# EAGLE board ARTIC_R2_Module-Panel (EAGLE 9.6.2), part 1 of 11
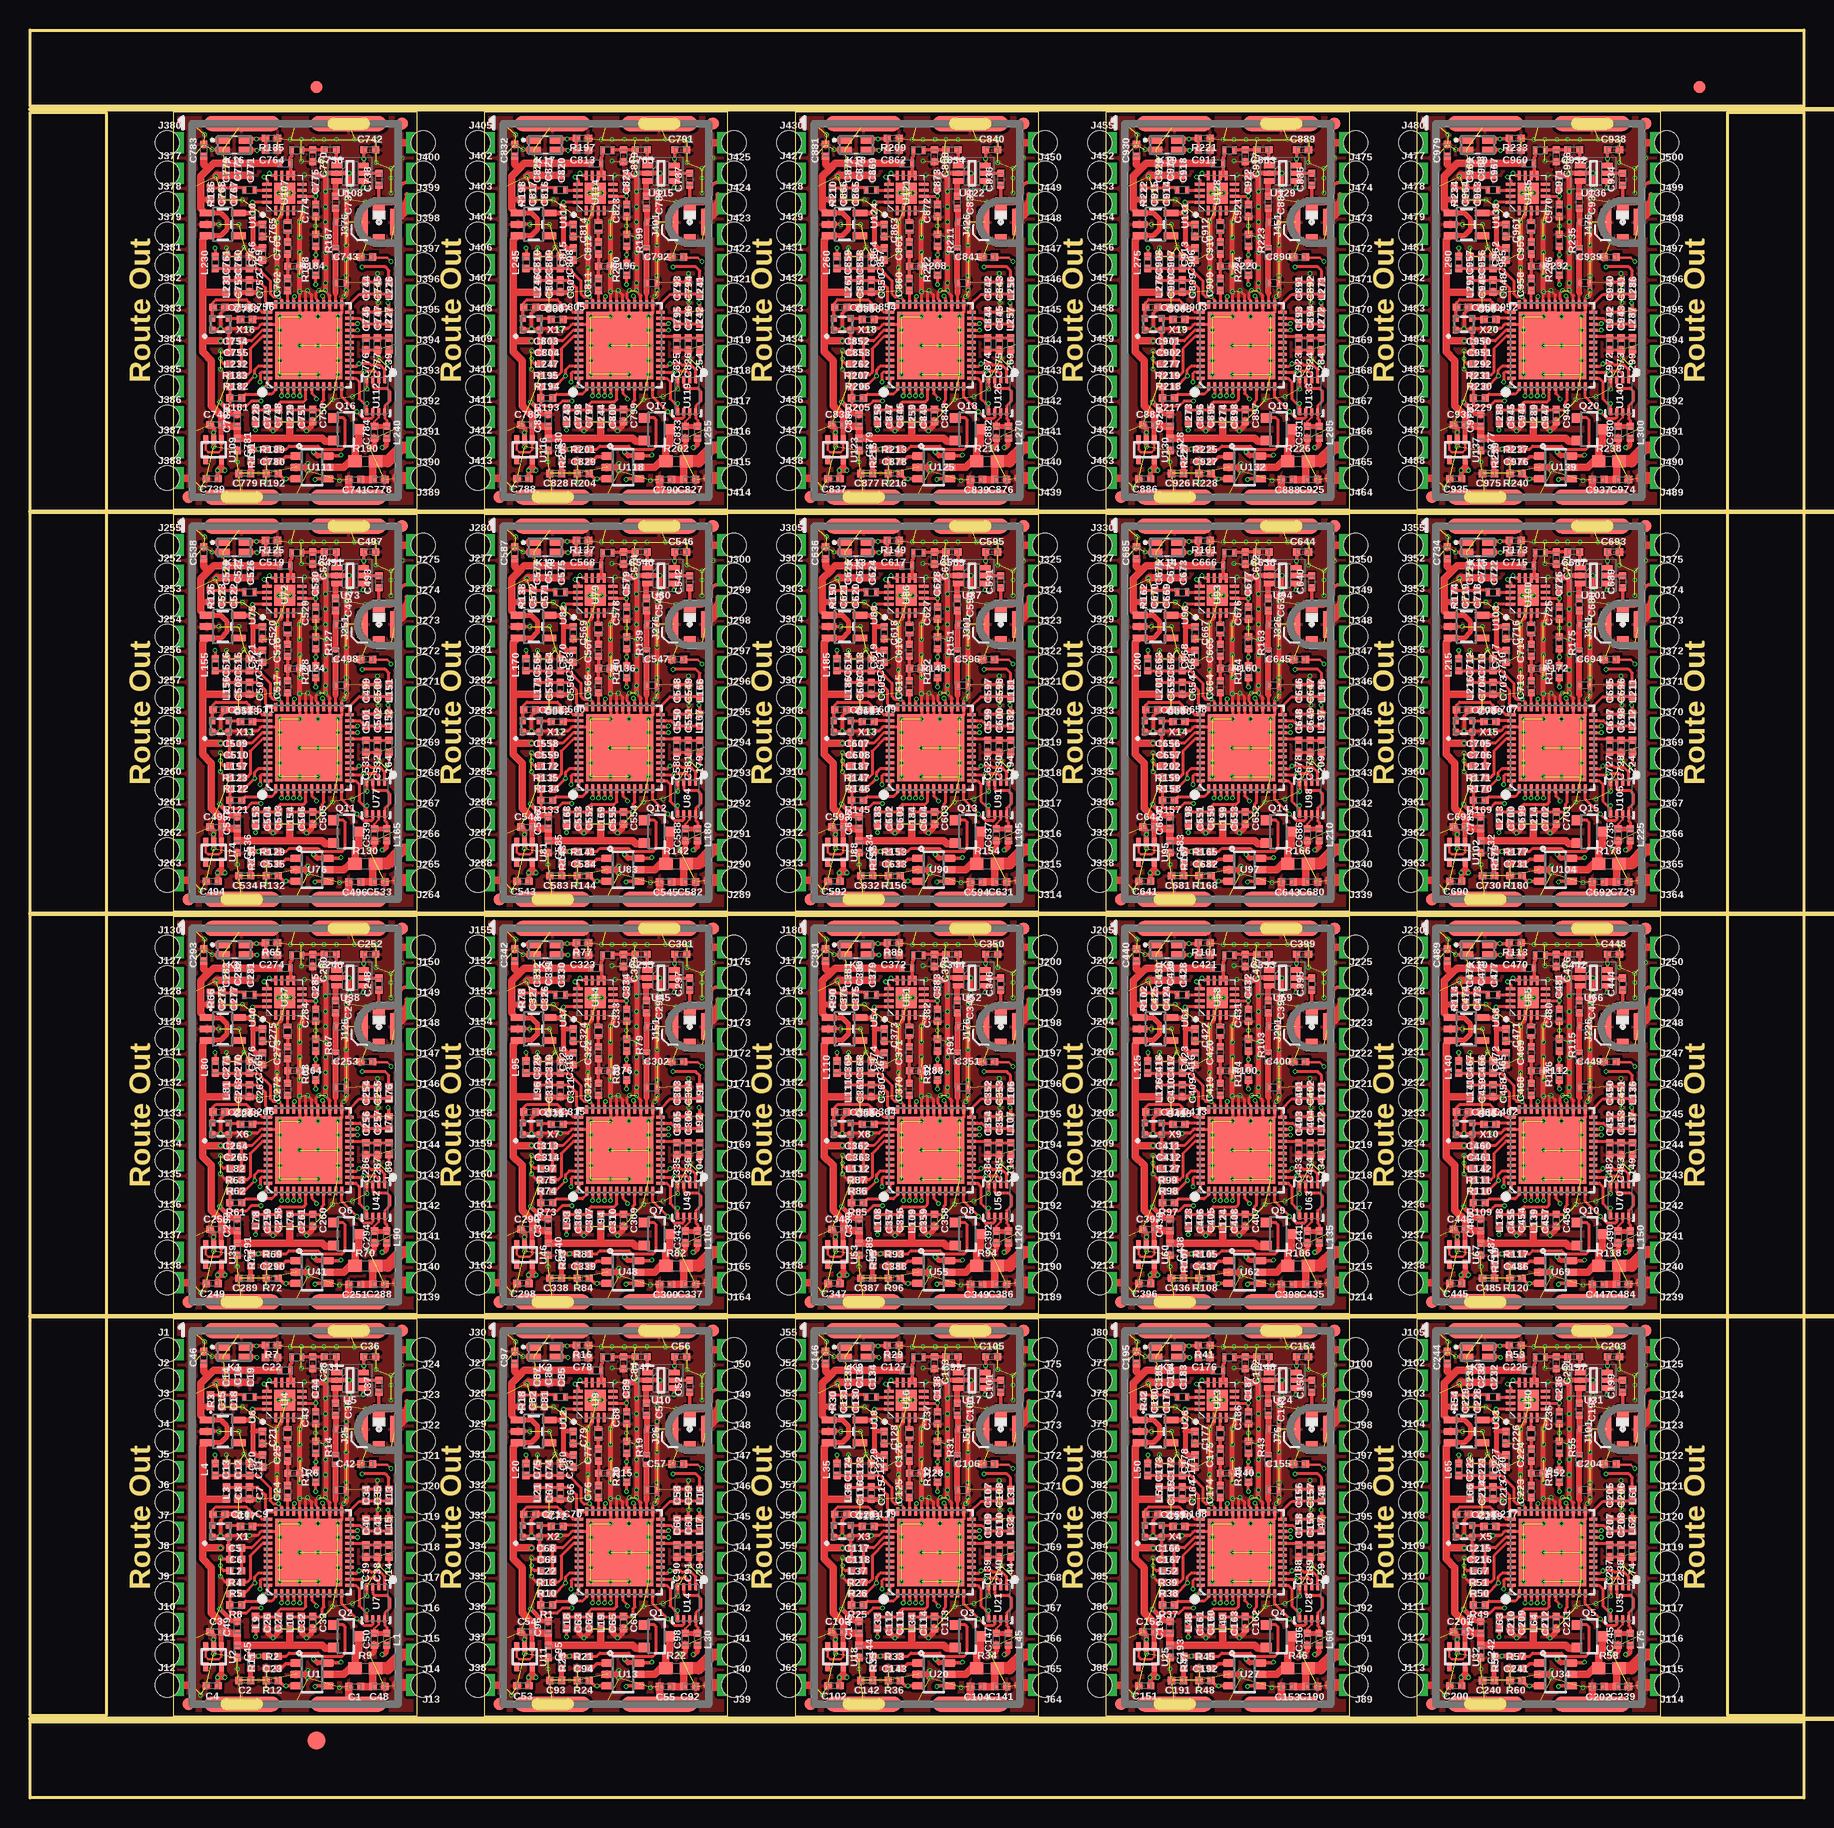
[diagram p0: board, top side]
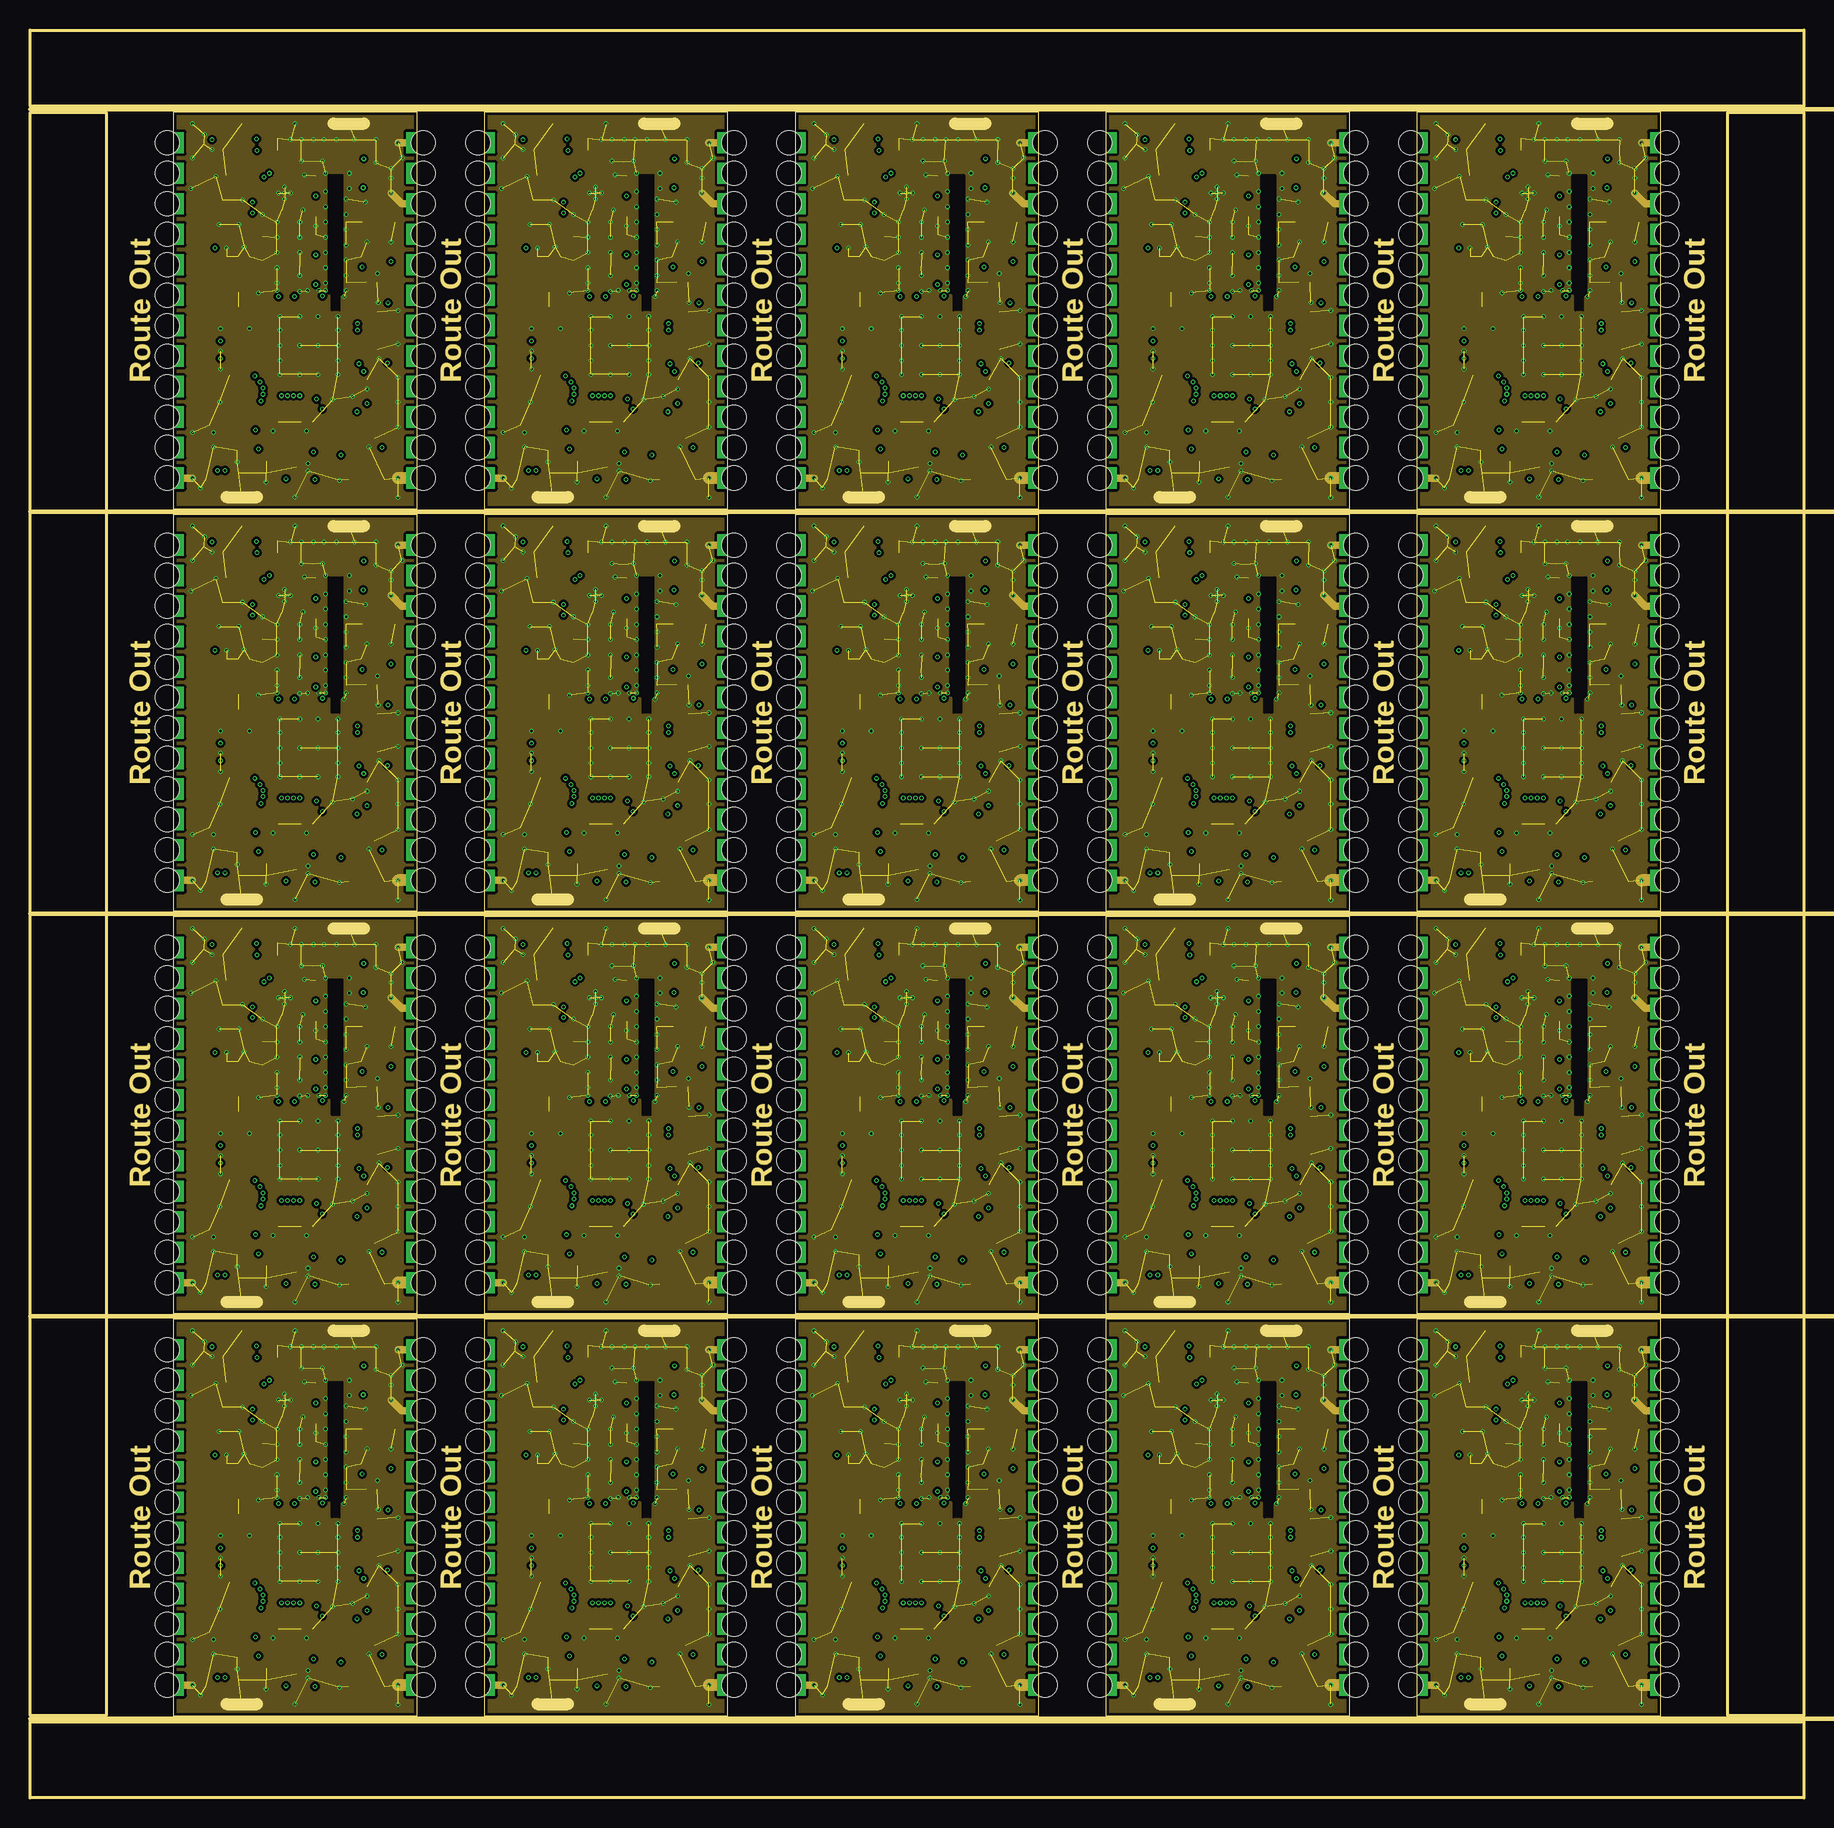
[diagram p1: board, inner layer Route2]
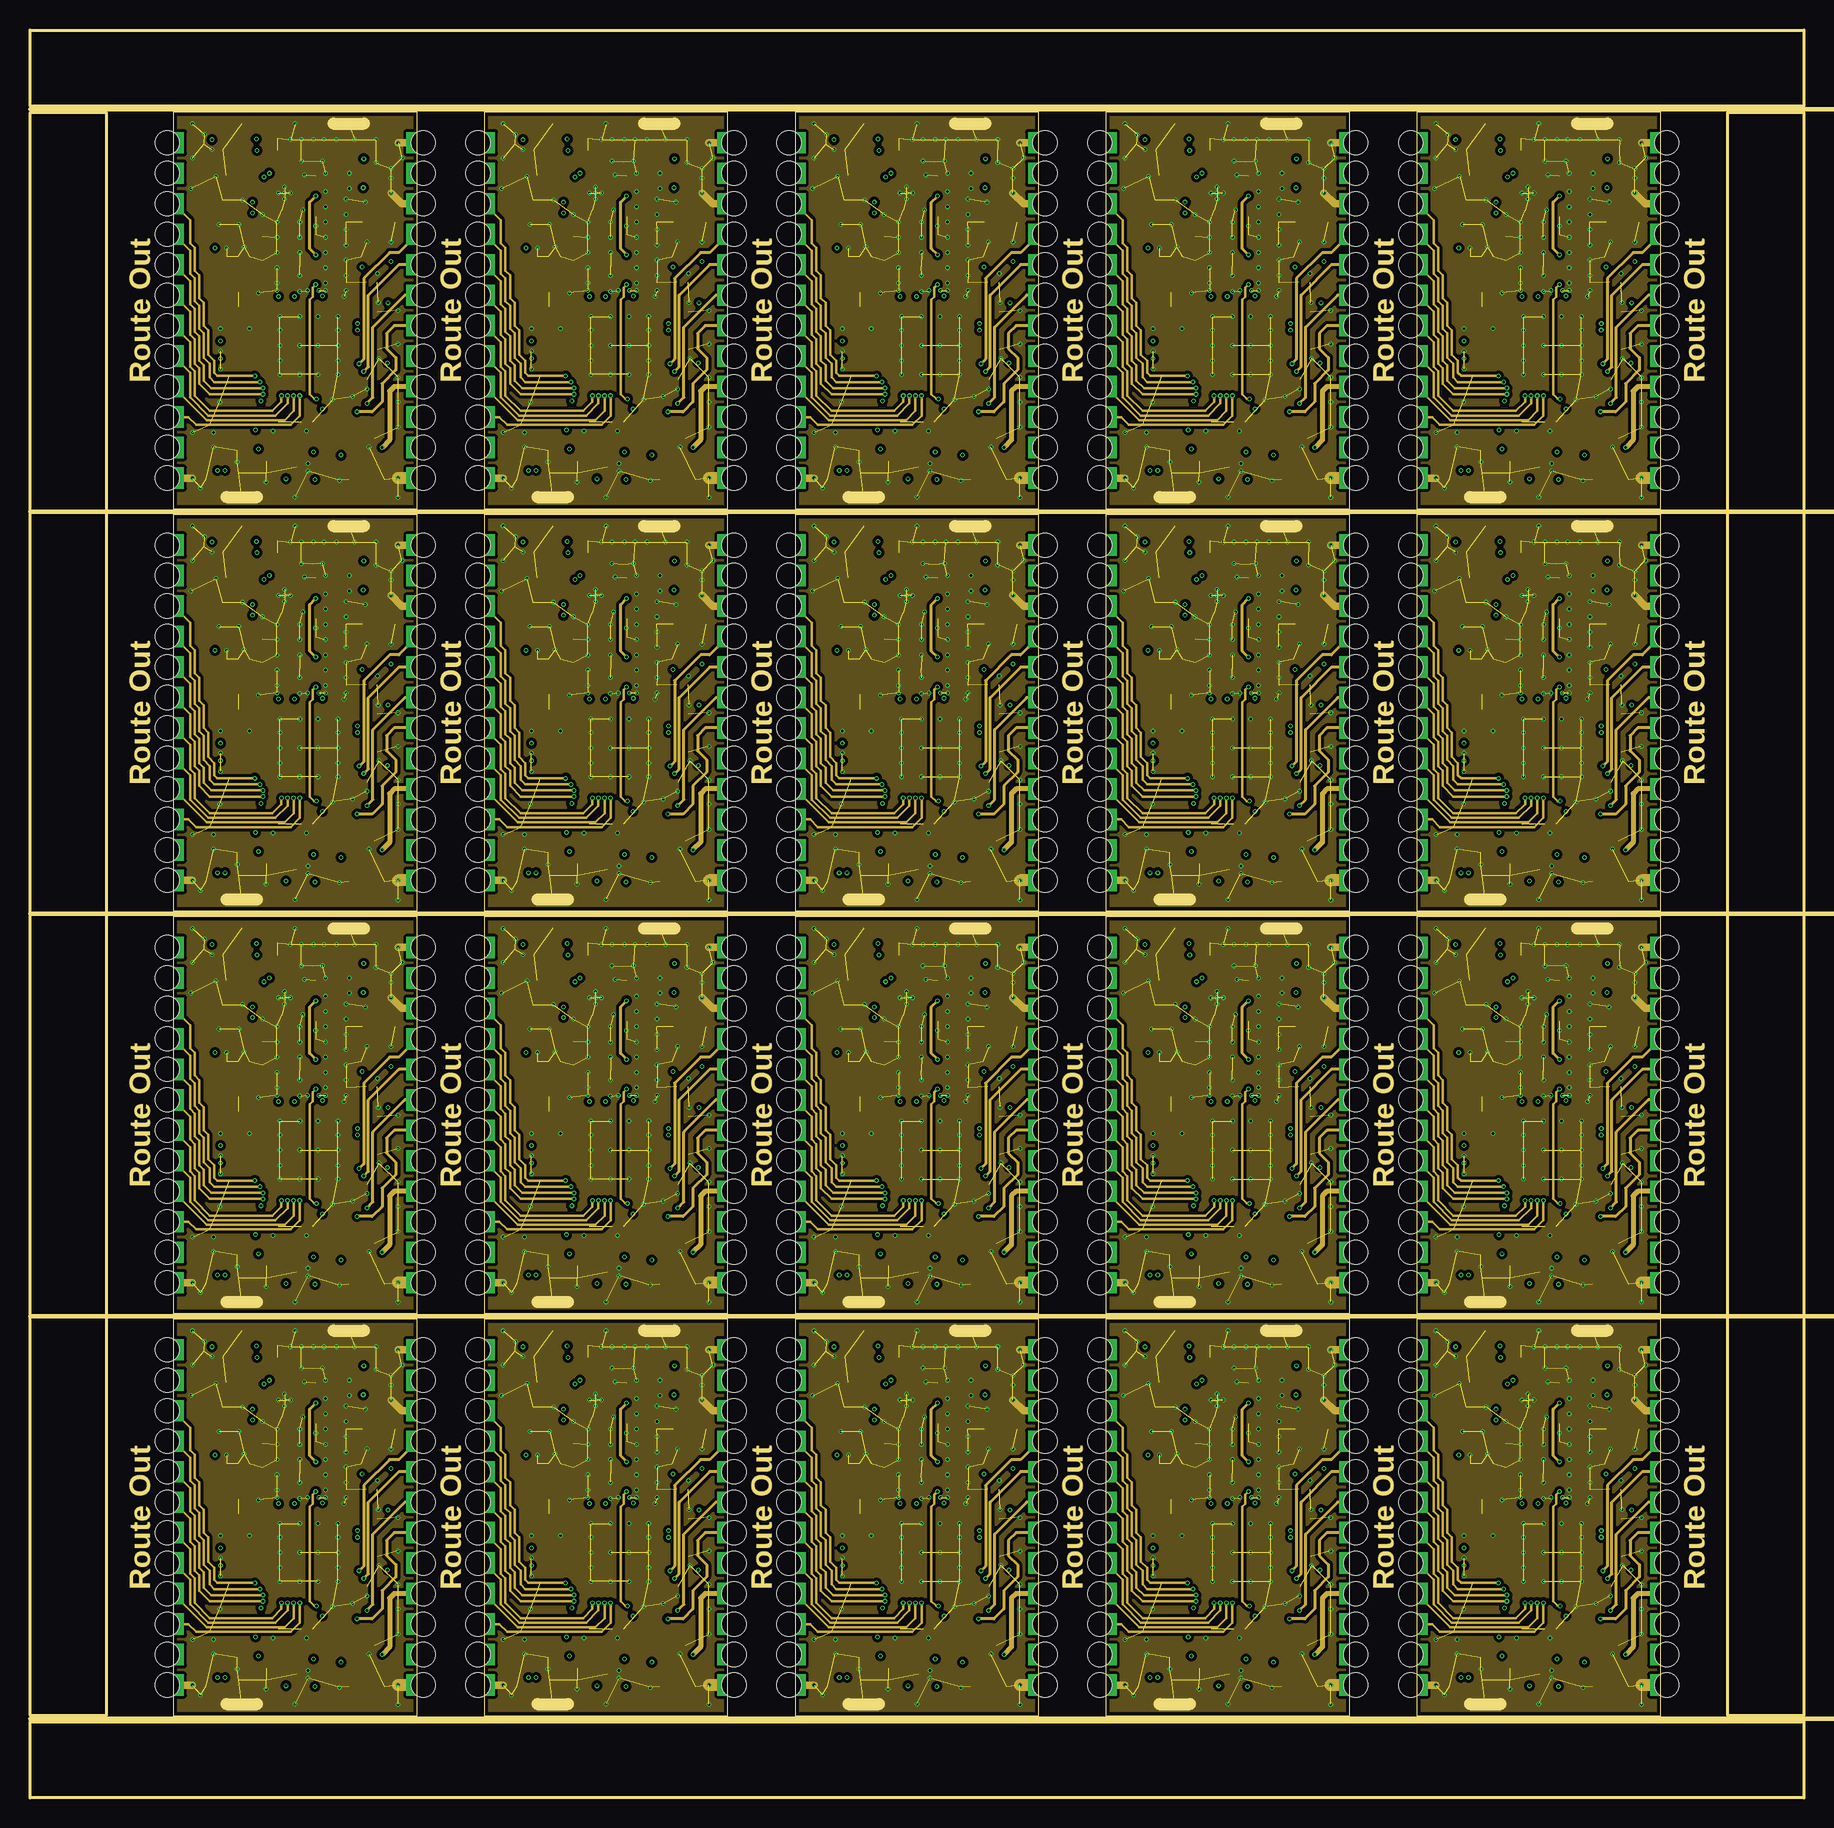
[diagram p2: board, inner layer Route15]
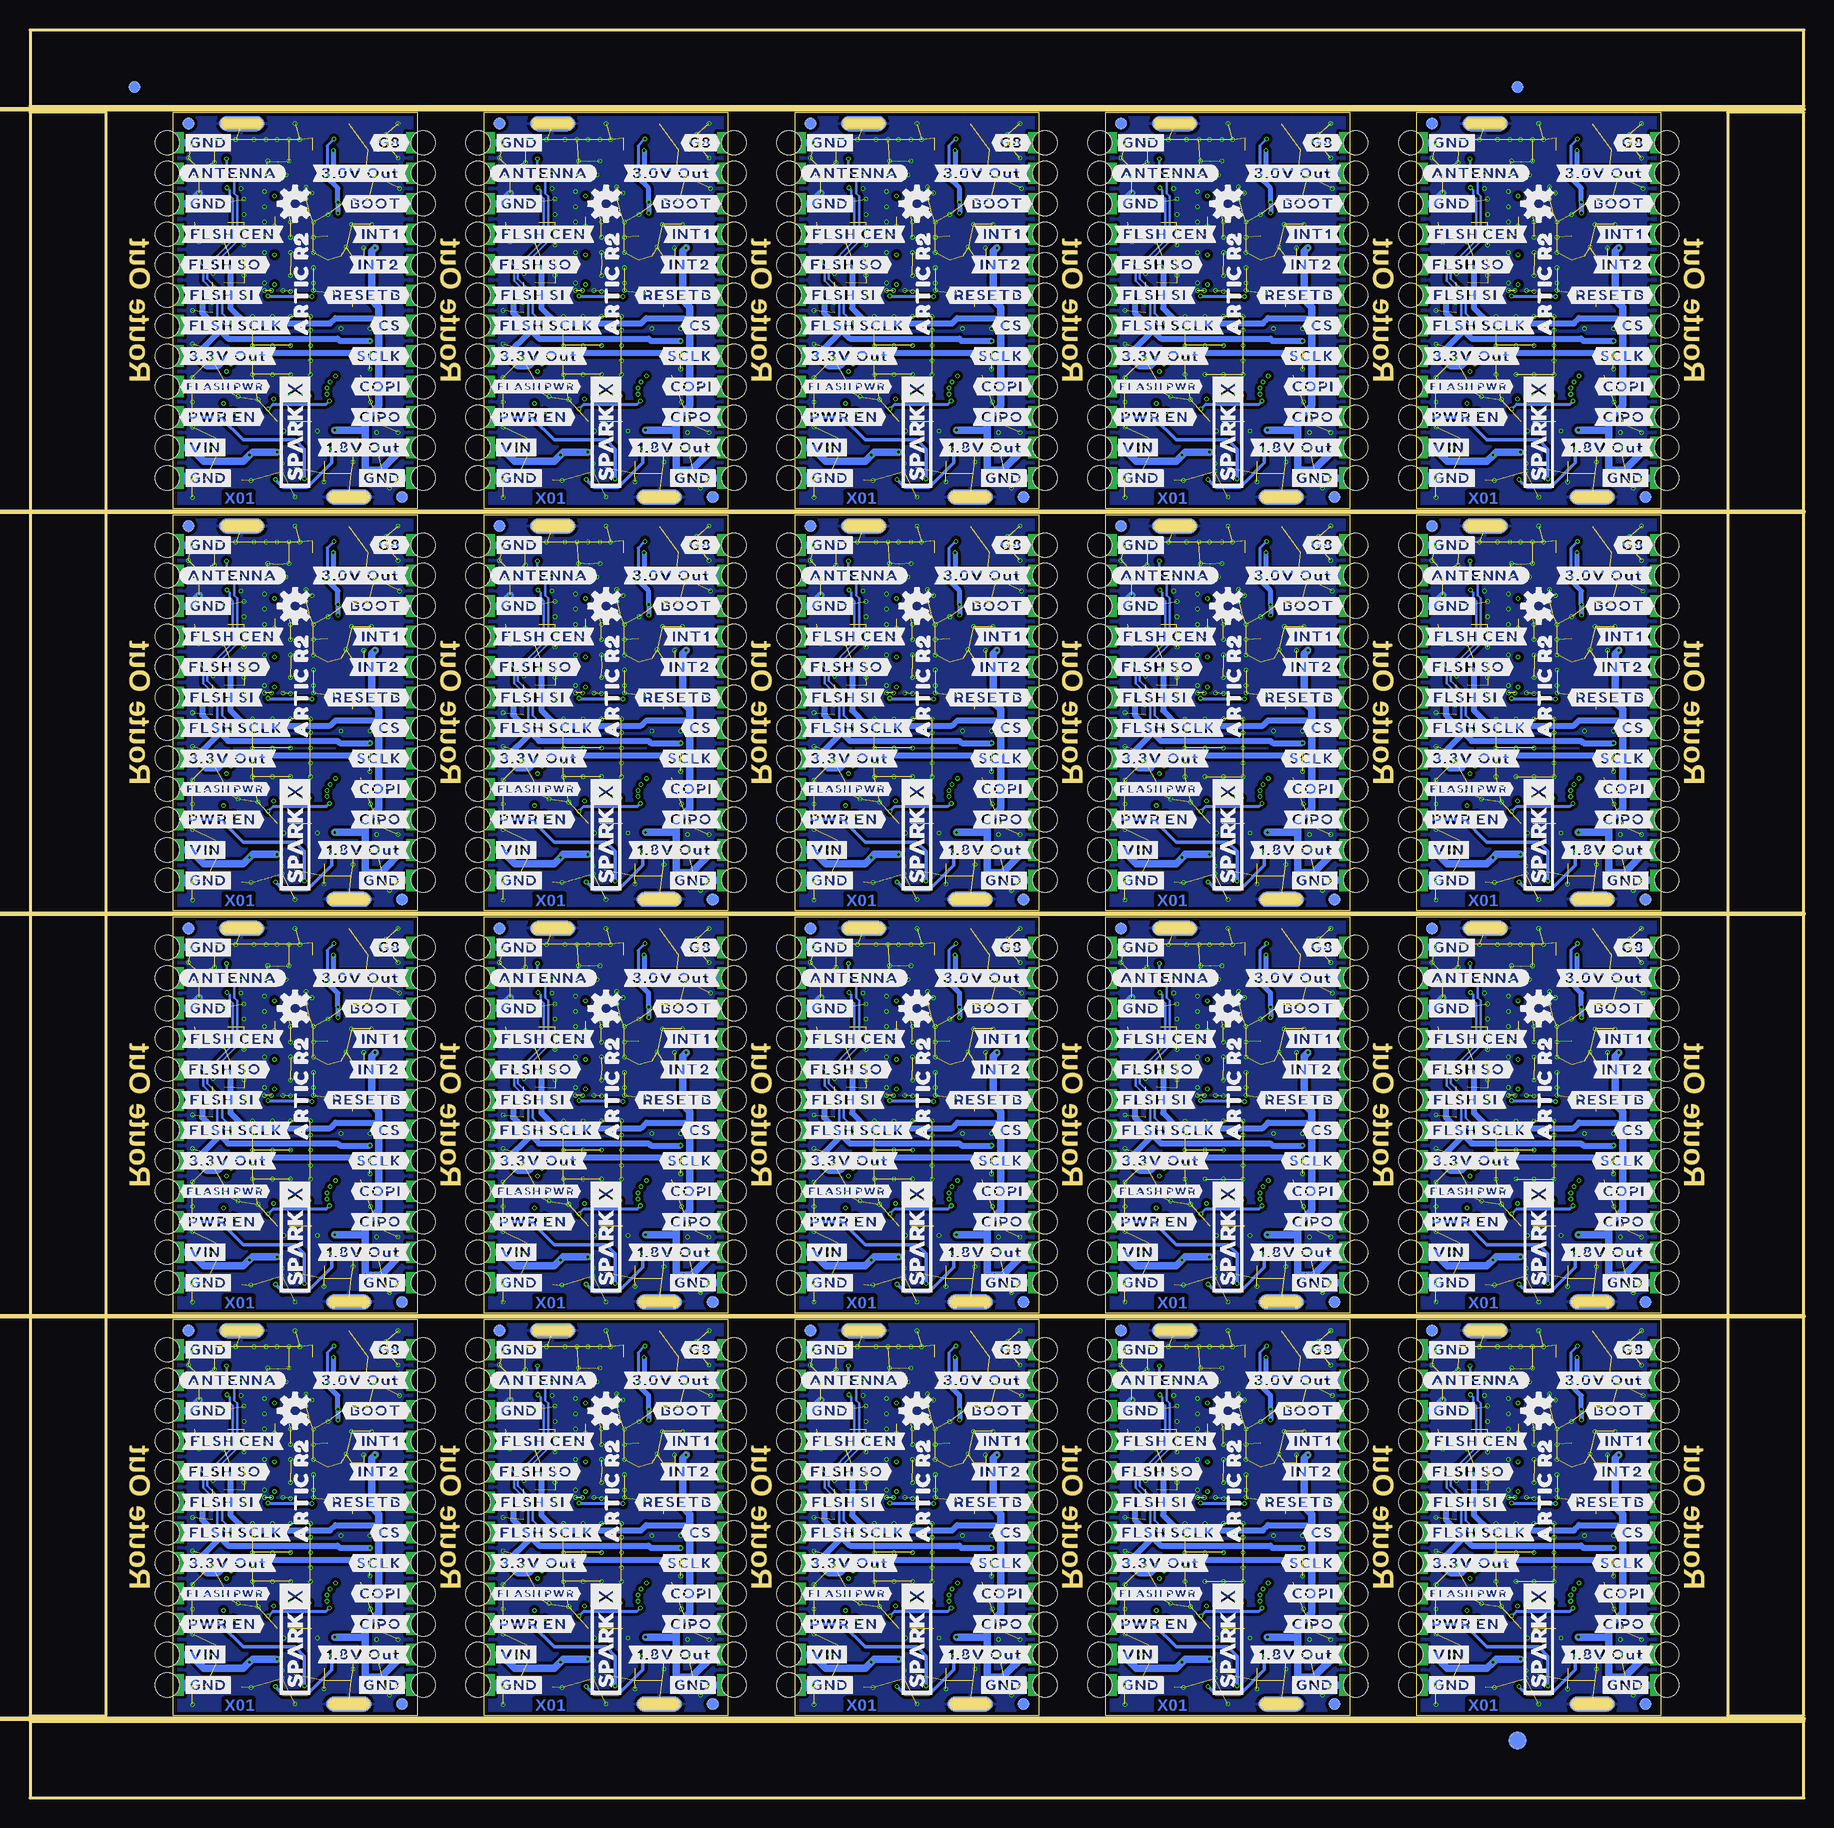
[diagram p3: board, bottom side, seen from below]

Size 147.83 x 147.32 mm. Coordinates in mm from the lower left corner, seen from the top.
Outline: 11.94,39.88 11.94,6.86 32.26,6.86 32.26,39.88 11.94,39.88
Outline: 37.85,39.88 37.85,6.86 58.17,6.86 58.17,39.88 37.85,39.88
Outline: 63.75,39.88 63.75,6.86 84.07,6.86 84.07,39.88 63.75,39.88
Outline: 89.66,39.88 89.66,6.86 109.98,6.86 109.98,39.88 89.66,39.88
Outline: 115.57,39.88 115.57,6.86 135.89,6.86 135.89,39.88 115.57,39.88
Outline: 11.94,73.41 11.94,40.39 32.26,40.39 32.26,73.41 11.94,73.41
Outline: 37.85,73.41 37.85,40.39 58.17,40.39 58.17,73.41 37.85,73.41
Outline: 63.75,73.41 63.75,40.39 84.07,40.39 84.07,73.41 63.75,73.41
Outline: 89.66,73.41 89.66,40.39 109.98,40.39 109.98,73.41 89.66,73.41
Outline: 115.57,73.41 115.57,40.39 135.89,40.39 135.89,73.41 115.57,73.41
Outline: 11.94,106.93 11.94,73.91 32.26,73.91 32.26,106.93 11.94,106.93
Outline: 37.85,106.93 37.85,73.91 58.17,73.91 58.17,106.93 37.85,106.93
Outline: 63.75,106.93 63.75,73.91 84.07,73.91 84.07,106.93 63.75,106.93
Outline: 89.66,106.93 89.66,73.91 109.98,73.91 109.98,106.93 89.66,106.93
Outline: 115.57,106.93 115.57,73.91 135.89,73.91 135.89,106.93 115.57,106.93
Outline: 11.94,140.46 11.94,107.44 32.26,107.44 32.26,140.46 11.94,140.46
Outline: 37.85,140.46 37.85,107.44 58.17,107.44 58.17,140.46 37.85,140.46
Outline: 63.75,140.46 63.75,107.44 84.07,107.44 84.07,140.46 63.75,140.46
Outline: 89.66,140.46 89.66,107.44 109.98,107.44 109.98,140.46 89.66,140.46
Outline: 115.57,140.46 115.57,107.44 135.89,107.44 135.89,140.46 115.57,140.46
Outline: 0,6.35 147.83,6.35 147.83,0 0,0 0,6.35
Outline: 141.48,140.46 147.83,140.46 147.83,6.86 141.48,6.86 141.48,140.46
Outline: 0,147.32 147.83,147.32 147.83,140.97 0,140.97 0,147.32
Outline: 0,140.46 6.35,140.46 6.35,6.86 0,6.86 0,140.46
Copper layers (1+2*15+16): Top 0.035mm / dielectric 0.2mm / Route2 0.0175mm / dielectric 0.265mm / Route15 0.0175mm / dielectric 0.2mm / Bottom 0.035mm
Design rules "ARTIC_R2_Module": minimum track width 5mil, minimum drill 0.2mm, track to track 5mil, track to pad 5mil, pad to pad 5mil, via to via 5mil, smd to smd 0mil, copper to edge 5mil, drill to drill 5mil, minimum pad ring 3.5mil, minimum via ring 3.5mil, stop-mask expansion 2.5mil, vias tented up to drill 25mil, thermal gap 10mil
tRestrict: area 28.4,29.8 to 29.7,31.6; area 54.4,29.8 to 55.6,31.6; area 80.3,29.8 to 81.5,31.6; area 106.2,29.8 to 107.4,31.6; area 132.1,29.8 to 133.3,31.6; area 28.4,63.4 to 29.7,65.2; area 54.4,63.4 to 55.6,65.2; area 80.3,63.4 to 81.5,65.2; area 106.2,63.4 to 107.4,65.2; area 132.1,63.4 to 133.3,65.2; area 28.4,96.9 to 29.7,98.7; area 54.4,96.9 to 55.6,98.7; area 80.3,96.9 to 81.5,98.7; area 106.2,96.9 to 107.4,98.7; area 132.1,96.9 to 133.3,98.7; area 28.4,130.4 to 29.7,132.2; area 54.4,130.4 to 55.6,132.2; area 80.3,130.4 to 81.5,132.2; area 106.2,130.4 to 107.4,132.2; area 132.1,130.4 to 133.3,132.2; 60 lines
Milling: 5 lines

## Footprints (pad centres in the part's own frame; a part is rotated, then mirrored left to right if it is on the bottom)
0402-TIGHT = smd 0.6 x 0.6: 1 -0.5,0; 2 0.5,0
0402_MURATA = smd 0.4 x 0.6: P$1 -0.4,0; P$2 0.4,0
FIDUCIAL-1X2 = smd 1 x 1: 1 0,0
FIDUCIAL-1.5X3 = smd 1.5 x 1.5: 1 0,0
CONN_01_CASTELLATED_4LAYER = drill 0.3 pad 1.778 square: 1 0,0 | hole 1.999: -0.508,0
U.FL = smd 2.2 x 0.85: 1 0,1.375; 2 0,-1.375 | smd 1.05 x 1: FEED 1.525,0; NC -1.525,0
TLP3475RTPF = smd 1.15 x 0.55: 1 -0.95,0.4; 2 -0.95,-0.4; 3 0.95,-0.4; 4 0.95,0.4
0402_COILCRAFT = smd 0.356 x 0.66: P$1 -0.432,0; P$2 0.432,0
SOT23-3 = smd 0.8 x 0.9: 1 -0.95,-1; 2 0.95,-1; 3 0,1.1
0603 = smd 1.1 x 1: 1 -0.85,0; 2 0.85,0
ARTIC_R2_CASTELLATED = smd 6.35 x 1.27: 1-1 -4.445,-15.557; 2 4.445,-15.557; 3-1 4.445,15.557; 4 -4.445,15.557 | smd 3.81 x 1.27 bottom: 1-16 -4.445,-15.557; 3-16 4.445,15.557
TSOT6 = smd 0.6 x 1.05: 1 -0.95,-1.3; 2 0,-1.3; 3 0.95,-1.3; 4 0.95,1.3; 5 0,1.3; 6 -0.95,1.3
SC70 = smd 0.4 x 0.75: 1 -0.65,-0.825; 2 0,-0.825; 3 0.65,-0.825; 4 0.65,0.825; 5 -0.65,0.825
QFN-48 = smd 0.7 x 0.25: 1 -3.4,2.75; 2 -3.4,2.25; 3 -3.4,1.75; 4 -3.4,1.25; 5 -3.4,0.75; 6 -3.4,0.25; 7 -3.4,-0.25; 8 -3.4,-0.75; 9 -3.4,-1.25; 10 -3.4,-1.75; 11 -3.4,-2.25; 12 -3.4,-2.75; 25 3.4,-2.75; 26 3.4,-2.25; 27 3.4,-1.75; 28 3.4,-1.25; 29 3.4,-0.75; 30 3.4,-0.25; 31 3.4,0.25; 32 3.4,0.75; 33 3.4,1.25; 34 3.4,1.75; 35 3.4,2.25; 36 3.4,2.75 | smd 0.25 x 0.7: 13 -2.75,-3.4; 14 -2.25,-3.4; 15 -1.75,-3.4; 16 -1.25,-3.4; 17 -0.75,-3.4; 18 -0.25,-3.4; 19 0.25,-3.4; 20 0.75,-3.4; 21 1.25,-3.4; 22 1.75,-3.4; 23 2.25,-3.4; 24 2.75,-3.4; 37 2.75,3.4; 38 2.25,3.4; 39 1.75,3.4; 40 1.25,3.4; 41 0.75,3.4; 42 0.25,3.4; 43 -0.25,3.4; 44 -0.75,3.4; 45 -1.25,3.4; 46 -1.75,3.4; 47 -2.25,3.4; 48 -2.75,3.4 | smd 5.6 x 5.6: GND 0,0
QFN50P300X300X86-17N = smd 0.8 x 0.25: 1 -1.45,0.75; 2 -1.45,0.25; 3 -1.45,-0.25; 4 -1.45,-0.75; 9 1.45,-0.75; 10 1.45,-0.25; 11 1.45,0.25; 12 1.45,0.75 | smd 0.25 x 0.8: 5 -0.75,-1.45; 6 -0.25,-1.45; 7 0.25,-1.45; 8 0.75,-1.45; 13 0.75,1.45; 14 0.25,1.45; 15 -0.25,1.45; 16 -0.75,1.45 | smd 1.75 x 1.75: EDAP 0,0
SOT65P220X100-6N = smd 0.95 x 0.45: 1 -1.1,0.65; 2 -1.1,0; 3 -1.1,-0.65; 4 1.1,-0.65; 5 1.1,0; 6 1.1,0.65
SOT23-5 = smd 0.55 x 1.2: 1 -0.95,-1.3; 2 0,-1.3; 3 0.95,-1.3; 4 0.95,1.3; 5 -0.95,1.3
USON_3X2MM = smd 0.6 x 0.25: 1 -1.325,0.75; 2 -1.325,0.25; 3 -1.325,-0.25; 4 -1.325,-0.75; 5 1.325,-0.75; 6 1.325,-0.25; 7 1.325,0.25; 8 1.325,0.75
CRYSTAL-TCXO-SMD-1.65X1.25 = smd 0.5 x 0.55: 1 -0.7,-0.475; 2 0.7,-0.475; 3 0.7,0.475; 4 -0.7,0.475

## Placement (x,y rotation side)
C1  2.2uF  [0402-TIGHT]  27.05,9.27 180 top
C2  10nF  [0402-TIGHT]  17.91,9.78 180 top
C3  1.0uF  [0402-TIGHT]  15.49,13.84 180 top
C4  1.0uF  [0402-TIGHT]  15.18,9.33 180 top
C5  22pF  [0402-TIGHT]  17.14,20.83 180 top
C6  0.1uF  [0402-TIGHT]  17.14,19.88 180 top
C7  22pF  [0402-TIGHT]  18.29,25.4 270 top
C8  0.1uF  [0402-TIGHT]  17.34,25.4 270 top
C9  1.0uF  [0402-TIGHT]  17.78,23.62 180 top
C10  47nF  [0402-TIGHT]  15.75,23.62 0 top
C11  100pF  [0402-TIGHT]  18.29,27.37 90 top
C12  1.0uF  [0402-TIGHT]  17.34,27.37 90 top
C13  10uF  [0402-TIGHT]  16.38,27.37 90 top
C14  10uF  [0402-TIGHT]  16.32,35.12 270 top
C15  2.2uF  [0402-TIGHT]  16,33.08 270 top
C16  2.2uF  [0402-TIGHT]  17.34,35.12 270 top
C17  1.0nF  [0402-TIGHT]  18.03,22.61 0 top
C18  22pF  [0402-TIGHT]  16.95,33.08 270 top
C19  100pF  [0402-TIGHT]  18.35,35.12 270 top
C20  2.2uF  [0402-TIGHT]  19.37,28.07 90 top
C21  100pF  [0402-TIGHT]  19.37,30.04 90 top
C22  100pF  [0402-TIGHT]  20.13,36.7 180 top
C23  1.0uF  [0402-TIGHT]  20.19,10.79 180 top
C24  100pF  [0402-TIGHT]  21.46,25.53 90 top
C25  100pF  [0402-TIGHT]  21.46,28.57 90 top
C26  0.1uF  [0402-TIGHT]  19.75,14.61 270 top
C27  22pF  [0402-TIGHT]  20.7,14.61 270 top
C28  9.1pF  [0402-TIGHT]  23.56,36.26 90 top
C29  2.4 pF  [0402_MURATA]  25.46,28.19 90 top
C30  100pF  [0402-TIGHT]  25.46,32.38 270 top
C31  100pF  [0402-TIGHT]  25.02,36.77 180 top
C32  0.1uF  [0402-TIGHT]  22.61,14.61 270 top
C33  22pF  [0402-TIGHT]  23.56,14.61 270 top
C34  22pF  [0402-TIGHT]  28,25.21 90 top
C35  0.1uF  [0402-TIGHT]  28.96,25.21 90 top
C36  100pF  [0402-TIGHT]  28.32,36.77 0 top
C37  100pF  [0402-TIGHT]  29.08,34.29 90 top
C38  0.1uF  [0402-TIGHT]  28.96,20.57 270 top
C39  22pF  [0402-TIGHT]  28,20.57 270 top
C40  22pF  [0402-TIGHT]  28,22.73 90 top
C41  0.1uF  [0402-TIGHT]  28.96,22.73 90 top
C42  100pF  [0402-TIGHT]  28.07,27.81 180 top
C43  100pF  [0402-TIGHT]  23.81,31.69 90 top
C44  2.2uF  [0402-TIGHT]  23.81,34.1 90 top
C45  2.2uF  [0402-TIGHT]  17.27,12.19 270 top
C46  1.0uF  [0402-TIGHT]  14.48,36.7 90 top
C47  100pF  [0402-TIGHT]  50.93,36.77 180 top
C48  0.1uF  [0402-TIGHT]  29.08,9.27 0 top
C49  0.1uF  [0402-TIGHT]  17.27,14.22 90 top
C50  0.1uF  [0402-TIGHT]  28.7,13.21 270 top
C51  100pF  [0402-TIGHT]  51.37,32.38 270 top
C52  100pF  [0402-TIGHT]  54.99,34.29 90 top
C53  1.0uF  [0402-TIGHT]  41.08,9.33 180 top
C54  1.0uF  [0402-TIGHT]  41.4,13.84 180 top
C55  2.2uF  [0402-TIGHT]  52.96,9.27 180 top
C56  100pF  [0402-TIGHT]  54.23,36.77 0 top
C57  100pF  [0402-TIGHT]  53.98,27.81 180 top
C58  22pF  [0402-TIGHT]  53.91,25.21 90 top
C59  0.1uF  [0402-TIGHT]  54.86,25.21 90 top
C60  22pF  [0402-TIGHT]  53.91,22.73 90 top
C61  0.1uF  [0402-TIGHT]  54.86,22.73 90 top
C62  22pF  [0402-TIGHT]  46.61,14.61 270 top
C63  0.1uF  [0402-TIGHT]  45.66,14.61 270 top
C64  22pF  [0402-TIGHT]  49.47,14.61 270 top
C65  0.1uF  [0402-TIGHT]  48.51,14.61 270 top
C66  22pF  [0402-TIGHT]  44.2,25.4 270 top
C67  0.1uF  [0402-TIGHT]  43.24,25.4 270 top
C68  22pF  [0402-TIGHT]  43.05,20.83 180 top
C69  0.1uF  [0402-TIGHT]  43.05,19.88 180 top
C70  1.0uF  [0402-TIGHT]  43.69,23.62 180 top
C71  47nF  [0402-TIGHT]  41.66,23.62 0 top
C72  1.0nF  [0402-TIGHT]  43.94,22.61 0 top
C73  100pF  [0402-TIGHT]  44.2,27.37 90 top
C74  1.0uF  [0402-TIGHT]  43.24,27.37 90 top
C75  10uF  [0402-TIGHT]  42.29,27.37 90 top
C76  100pF  [0402-TIGHT]  47.37,25.53 90 top
C77  100pF  [0402-TIGHT]  47.37,28.57 90 top
C78  100pF  [0402-TIGHT]  46.04,36.7 180 top
C79  100pF  [0402-TIGHT]  45.28,30.04 90 top
C80  2.2uF  [0402-TIGHT]  45.28,28.07 90 top
C81  22pF  [0402-TIGHT]  42.86,33.08 270 top
C82  2.2uF  [0402-TIGHT]  41.91,33.08 270 top
C83  2.4 pF  [0402_MURATA]  51.37,28.19 90 top
C84  9.1pF  [0402-TIGHT]  49.47,36.26 90 top
C85  100pF  [0402-TIGHT]  44.26,35.12 270 top
C86  2.2uF  [0402-TIGHT]  43.24,35.12 270 top
C87  10uF  [0402-TIGHT]  42.23,35.12 270 top
C88  100pF  [0402-TIGHT]  49.72,31.69 90 top
C89  2.2uF  [0402-TIGHT]  49.72,34.1 90 top
C90  22pF  [0402-TIGHT]  53.91,20.57 270 top
C91  0.1uF  [0402-TIGHT]  54.86,20.57 270 top
C92  0.1uF  [0402-TIGHT]  54.99,9.27 0 top
C93  10nF  [0402-TIGHT]  43.81,9.78 180 top
C94  1.0uF  [0402-TIGHT]  46.1,10.79 180 top
C95  2.2uF  [0402-TIGHT]  43.18,12.19 270 top
C96  0.1uF  [0402-TIGHT]  43.18,14.22 90 top
C97  1.0uF  [0402-TIGHT]  40.39,36.7 90 top
C98  0.1uF  [0402-TIGHT]  54.61,13.21 270 top
C99  100pF  [0402-TIGHT]  76.84,36.77 180 top
C100  100pF  [0402-TIGHT]  77.28,32.38 270 top
C101  100pF  [0402-TIGHT]  80.9,34.29 90 top
C102  1.0uF  [0402-TIGHT]  66.99,9.33 180 top
C103  1.0uF  [0402-TIGHT]  67.31,13.84 180 top
C104  2.2uF  [0402-TIGHT]  78.87,9.27 180 top
C105  100pF  [0402-TIGHT]  80.14,36.77 0 top
C106  100pF  [0402-TIGHT]  79.88,27.81 180 top
C107  22pF  [0402-TIGHT]  79.82,25.21 90 top
C108  0.1uF  [0402-TIGHT]  80.77,25.21 90 top
C109  22pF  [0402-TIGHT]  79.82,22.73 90 top
C110  0.1uF  [0402-TIGHT]  80.77,22.73 90 top
C111  22pF  [0402-TIGHT]  72.52,14.61 270 top
C112  0.1uF  [0402-TIGHT]  71.56,14.61 270 top
C113  22pF  [0402-TIGHT]  75.37,14.61 270 top
C114  0.1uF  [0402-TIGHT]  74.42,14.61 270 top
C115  22pF  [0402-TIGHT]  70.1,25.4 270 top
C116  0.1uF  [0402-TIGHT]  69.15,25.4 270 top
C117  22pF  [0402-TIGHT]  68.96,20.83 180 top
C118  0.1uF  [0402-TIGHT]  68.96,19.88 180 top
C119  1.0uF  [0402-TIGHT]  69.6,23.62 180 top
C120  47nF  [0402-TIGHT]  67.56,23.62 0 top
C121  1.0nF  [0402-TIGHT]  69.85,22.61 0 top
C122  100pF  [0402-TIGHT]  70.1,27.37 90 top
C123  1.0uF  [0402-TIGHT]  69.15,27.37 90 top
C124  10uF  [0402-TIGHT]  68.2,27.37 90 top
C125  100pF  [0402-TIGHT]  73.28,25.53 90 top
C126  100pF  [0402-TIGHT]  73.28,28.57 90 top
C127  100pF  [0402-TIGHT]  71.95,36.7 180 top
C128  100pF  [0402-TIGHT]  71.18,30.04 90 top
C129  2.2uF  [0402-TIGHT]  71.18,28.07 90 top
C130  22pF  [0402-TIGHT]  68.77,33.08 270 top
C131  2.2uF  [0402-TIGHT]  67.82,33.08 270 top
C132  2.4 pF  [0402_MURATA]  77.28,28.19 90 top
C133  9.1pF  [0402-TIGHT]  75.37,36.26 90 top
C134  100pF  [0402-TIGHT]  70.17,35.12 270 top
C135  2.2uF  [0402-TIGHT]  69.15,35.12 270 top
C136  10uF  [0402-TIGHT]  68.14,35.12 270 top
C137  100pF  [0402-TIGHT]  75.63,31.69 90 top
C138  2.2uF  [0402-TIGHT]  75.63,34.1 90 top
C139  22pF  [0402-TIGHT]  79.82,20.57 270 top
C140  0.1uF  [0402-TIGHT]  80.77,20.57 270 top
C141  0.1uF  [0402-TIGHT]  80.9,9.27 0 top
C142  10nF  [0402-TIGHT]  69.72,9.78 180 top
C143  1.0uF  [0402-TIGHT]  72.01,10.79 180 top
C144  2.2uF  [0402-TIGHT]  69.09,12.19 270 top
C145  0.1uF  [0402-TIGHT]  69.09,14.22 90 top
C146  1.0uF  [0402-TIGHT]  66.29,36.7 90 top
C147  0.1uF  [0402-TIGHT]  80.52,13.21 270 top
C148  100pF  [0402-TIGHT]  102.74,36.77 180 top
C149  100pF  [0402-TIGHT]  103.19,32.38 270 top
C150  100pF  [0402-TIGHT]  106.81,34.29 90 top
C151  1.0uF  [0402-TIGHT]  92.9,9.33 180 top
C152  1.0uF  [0402-TIGHT]  93.22,13.84 180 top
C153  2.2uF  [0402-TIGHT]  104.78,9.27 180 top
C154  100pF  [0402-TIGHT]  106.05,36.77 0 top
C155  100pF  [0402-TIGHT]  105.79,27.81 180 top
C156  22pF  [0402-TIGHT]  105.73,25.21 90 top
C157  0.1uF  [0402-TIGHT]  106.68,25.21 90 top
C158  22pF  [0402-TIGHT]  105.73,22.73 90 top
C159  0.1uF  [0402-TIGHT]  106.68,22.73 90 top
C160  22pF  [0402-TIGHT]  98.42,14.61 270 top
C161  0.1uF  [0402-TIGHT]  97.47,14.61 270 top
C162  22pF  [0402-TIGHT]  101.28,14.61 270 top
C163  0.1uF  [0402-TIGHT]  100.33,14.61 270 top
C164  22pF  [0402-TIGHT]  96.01,25.4 270 top
C165  0.1uF  [0402-TIGHT]  95.06,25.4 270 top
C166  22pF  [0402-TIGHT]  94.87,20.83 180 top
C167  0.1uF  [0402-TIGHT]  94.87,19.88 180 top
C168  1.0uF  [0402-TIGHT]  95.5,23.62 180 top
C169  47nF  [0402-TIGHT]  93.47,23.62 0 top
C170  1.0nF  [0402-TIGHT]  95.76,22.61 0 top
C171  100pF  [0402-TIGHT]  96.01,27.37 90 top
C172  1.0uF  [0402-TIGHT]  95.06,27.37 90 top
C173  10uF  [0402-TIGHT]  94.11,27.37 90 top
C174  100pF  [0402-TIGHT]  99.19,25.53 90 top
C175  100pF  [0402-TIGHT]  99.19,28.57 90 top
C176  100pF  [0402-TIGHT]  97.85,36.7 180 top
C177  100pF  [0402-TIGHT]  97.09,30.04 90 top
C178  2.2uF  [0402-TIGHT]  97.09,28.07 90 top
C179  22pF  [0402-TIGHT]  94.68,33.08 270 top
C180  2.2uF  [0402-TIGHT]  93.73,33.08 270 top
C181  2.4 pF  [0402_MURATA]  103.19,28.19 90 top
C182  9.1pF  [0402-TIGHT]  101.28,36.26 90 top
C183  100pF  [0402-TIGHT]  96.08,35.12 270 top
C184  2.2uF  [0402-TIGHT]  95.06,35.12 270 top
C185  10uF  [0402-TIGHT]  94.04,35.12 270 top
C186  100pF  [0402-TIGHT]  101.54,31.69 90 top
C187  2.2uF  [0402-TIGHT]  101.54,34.1 90 top
C188  22pF  [0402-TIGHT]  105.73,20.57 270 top
C189  0.1uF  [0402-TIGHT]  106.68,20.57 270 top
C190  0.1uF  [0402-TIGHT]  106.81,9.27 0 top
C191  10nF  [0402-TIGHT]  95.63,9.78 180 top
C192  1.0uF  [0402-TIGHT]  97.92,10.79 180 top
C193  2.2uF  [0402-TIGHT]  95,12.19 270 top
C194  0.1uF  [0402-TIGHT]  95,14.22 90 top
C195  1.0uF  [0402-TIGHT]  92.2,36.7 90 top
C196  0.1uF  [0402-TIGHT]  106.43,13.21 270 top
C197  100pF  [0402-TIGHT]  128.65,36.77 180 top
C198  100pF  [0402-TIGHT]  129.1,32.38 270 top
C199  100pF  [0402-TIGHT]  132.72,34.29 90 top
C200  1.0uF  [0402-TIGHT]  118.81,9.33 180 top
C201  1.0uF  [0402-TIGHT]  119.13,13.84 180 top
C202  2.2uF  [0402-TIGHT]  130.68,9.27 180 top
C203  100pF  [0402-TIGHT]  131.95,36.77 0 top
C204  100pF  [0402-TIGHT]  131.7,27.81 180 top
C205  22pF  [0402-TIGHT]  131.64,25.21 90 top
C206  0.1uF  [0402-TIGHT]  132.59,25.21 90 top
C207  22pF  [0402-TIGHT]  131.64,22.73 90 top
C208  0.1uF  [0402-TIGHT]  132.59,22.73 90 top
C209  22pF  [0402-TIGHT]  124.33,14.61 270 top
C210  0.1uF  [0402-TIGHT]  123.38,14.61 270 top
C211  22pF  [0402-TIGHT]  127.19,14.61 270 top
C212  0.1uF  [0402-TIGHT]  126.24,14.61 270 top
C213  22pF  [0402-TIGHT]  121.92,25.4 270 top
C214  0.1uF  [0402-TIGHT]  120.97,25.4 270 top
C215  22pF  [0402-TIGHT]  120.78,20.83 180 top
C216  0.1uF  [0402-TIGHT]  120.78,19.88 180 top
C217  1.0uF  [0402-TIGHT]  121.41,23.62 180 top
C218  47nF  [0402-TIGHT]  119.38,23.62 0 top
C219  1.0nF  [0402-TIGHT]  121.67,22.61 0 top
C220  100pF  [0402-TIGHT]  121.92,27.37 90 top
C221  1.0uF  [0402-TIGHT]  120.97,27.37 90 top
C222  10uF  [0402-TIGHT]  120.02,27.37 90 top
C223  100pF  [0402-TIGHT]  125.09,25.53 90 top
C224  100pF  [0402-TIGHT]  125.09,28.57 90 top
C225  100pF  [0402-TIGHT]  123.76,36.7 180 top
C226  100pF  [0402-TIGHT]  123,30.04 90 top
C227  2.2uF  [0402-TIGHT]  123,28.07 90 top
C228  22pF  [0402-TIGHT]  120.59,33.08 270 top
C229  2.2uF  [0402-TIGHT]  119.63,33.08 270 top
C230  2.4 pF  [0402_MURATA]  129.1,28.19 90 top
C231  9.1pF  [0402-TIGHT]  127.19,36.26 90 top
C232  100pF  [0402-TIGHT]  121.98,35.12 270 top
C233  2.2uF  [0402-TIGHT]  120.97,35.12 270 top
C234  10uF  [0402-TIGHT]  119.95,35.12 270 top
C235  100pF  [0402-TIGHT]  127.44,31.69 90 top
C236  2.2uF  [0402-TIGHT]  127.44,34.1 90 top
C237  22pF  [0402-TIGHT]  131.64,20.57 270 top
C238  0.1uF  [0402-TIGHT]  132.59,20.57 270 top
C239  0.1uF  [0402-TIGHT]  132.72,9.27 0 top
C240  10nF  [0402-TIGHT]  121.54,9.78 180 top
C241  1.0uF  [0402-TIGHT]  123.83,10.79 180 top
C242  2.2uF  [0402-TIGHT]  120.9,12.19 270 top
C243  0.1uF  [0402-TIGHT]  120.9,14.22 90 top
C244  1.0uF  [0402-TIGHT]  118.11,36.7 90 top
C245  0.1uF  [0402-TIGHT]  132.33,13.21 270 top
C246  100pF  [0402-TIGHT]  25.02,70.29 180 top
C247  100pF  [0402-TIGHT]  25.46,65.91 270 top
C248  100pF  [0402-TIGHT]  29.08,67.82 90 top
C249  1.0uF  [0402-TIGHT]  15.18,42.86 180 top
C250  1.0uF  [0402-TIGHT]  15.49,47.37 180 top
C251  2.2uF  [0402-TIGHT]  27.05,42.8 180 top
C252  100pF  [0402-TIGHT]  28.32,70.29 0 top
C253  100pF  [0402-TIGHT]  28.07,61.34 180 top
C254  22pF  [0402-TIGHT]  28,58.74 90 top
C255  0.1uF  [0402-TIGHT]  28.96,58.74 90 top
C256  22pF  [0402-TIGHT]  28,56.26 90 top
C257  0.1uF  [0402-TIGHT]  28.96,56.26 90 top
C258  22pF  [0402-TIGHT]  20.7,48.13 270 top
C259  0.1uF  [0402-TIGHT]  19.75,48.13 270 top
C260  22pF  [0402-TIGHT]  23.56,48.13 270 top
C261  0.1uF  [0402-TIGHT]  22.61,48.13 270 top
C262  22pF  [0402-TIGHT]  18.29,58.93 270 top
C263  0.1uF  [0402-TIGHT]  17.34,58.93 270 top
C264  22pF  [0402-TIGHT]  17.14,54.36 180 top
C265  0.1uF  [0402-TIGHT]  17.14,53.4 180 top
C266  1.0uF  [0402-TIGHT]  17.78,57.15 180 top
C267  47nF  [0402-TIGHT]  15.75,57.15 0 top
C268  1.0nF  [0402-TIGHT]  18.03,56.13 0 top
C269  100pF  [0402-TIGHT]  18.29,60.9 90 top
C270  1.0uF  [0402-TIGHT]  17.34,60.9 90 top
C271  10uF  [0402-TIGHT]  16.38,60.9 90 top
C272  100pF  [0402-TIGHT]  21.46,59.05 90 top
C273  100pF  [0402-TIGHT]  21.46,62.1 90 top
C274  100pF  [0402-TIGHT]  20.13,70.23 180 top
C275  100pF  [0402-TIGHT]  19.37,63.56 90 top
C276  2.2uF  [0402-TIGHT]  19.37,61.59 90 top
C277  22pF  [0402-TIGHT]  16.95,66.61 270 top
C278  2.2uF  [0402-TIGHT]  16,66.61 270 top
C279  2.4 pF  [0402_MURATA]  25.46,61.72 90 top
C280  9.1pF  [0402-TIGHT]  23.56,69.79 90 top
C281  100pF  [0402-TIGHT]  18.35,68.64 270 top
C282  2.2uF  [0402-TIGHT]  17.34,68.64 270 top
C283  10uF  [0402-TIGHT]  16.32,68.64 270 top
C284  100pF  [0402-TIGHT]  23.81,65.21 90 top
C285  2.2uF  [0402-TIGHT]  23.81,67.63 90 top
C286  22pF  [0402-TIGHT]  28,54.1 270 top
C287  0.1uF  [0402-TIGHT]  28.96,54.1 270 top
C288  0.1uF  [0402-TIGHT]  29.08,42.8 0 top
C289  10nF  [0402-TIGHT]  17.91,43.31 180 top
C290  1.0uF  [0402-TIGHT]  20.19,44.32 180 top
C291  2.2uF  [0402-TIGHT]  17.27,45.72 270 top
C292  0.1uF  [0402-TIGHT]  17.27,47.75 90 top
C293  1.0uF  [0402-TIGHT]  14.48,70.23 90 top
C294  0.1uF  [0402-TIGHT]  28.7,46.74 270 top
C295  100pF  [0402-TIGHT]  50.93,70.29 180 top
C296  100pF  [0402-TIGHT]  51.37,65.91 270 top
C297  100pF  [0402-TIGHT]  54.99,67.82 90 top
C298  1.0uF  [0402-TIGHT]  41.08,42.86 180 top
C299  1.0uF  [0402-TIGHT]  41.4,47.37 180 top
C300  2.2uF  [0402-TIGHT]  52.96,42.8 180 top
C301  100pF  [0402-TIGHT]  54.23,70.29 0 top
C302  100pF  [0402-TIGHT]  53.98,61.34 180 top
C303  22pF  [0402-TIGHT]  53.91,58.74 90 top
C304  0.1uF  [0402-TIGHT]  54.86,58.74 90 top
C305  22pF  [0402-TIGHT]  53.91,56.26 90 top
C306  0.1uF  [0402-TIGHT]  54.86,56.26 90 top
C307  22pF  [0402-TIGHT]  46.61,48.13 270 top
C308  0.1uF  [0402-TIGHT]  45.66,48.13 270 top
C309  22pF  [0402-TIGHT]  49.47,48.13 270 top
C310  0.1uF  [0402-TIGHT]  48.51,48.13 270 top
C311  22pF  [0402-TIGHT]  44.2,58.93 270 top
C312  0.1uF  [0402-TIGHT]  43.24,58.93 270 top
C313  22pF  [0402-TIGHT]  43.05,54.36 180 top
C314  0.1uF  [0402-TIGHT]  43.05,53.4 180 top
C315  1.0uF  [0402-TIGHT]  43.69,57.15 180 top
C316  47nF  [0402-TIGHT]  41.66,57.15 0 top
C317  1.0nF  [0402-TIGHT]  43.94,56.13 0 top
C318  100pF  [0402-TIGHT]  44.2,60.9 90 top
C319  1.0uF  [0402-TIGHT]  43.24,60.9 90 top
C320  10uF  [0402-TIGHT]  42.29,60.9 90 top
C321  100pF  [0402-TIGHT]  47.37,59.05 90 top
C322  100pF  [0402-TIGHT]  47.37,62.1 90 top
C323  100pF  [0402-TIGHT]  46.04,70.23 180 top
C324  100pF  [0402-TIGHT]  45.28,63.56 90 top
C325  2.2uF  [0402-TIGHT]  45.28,61.59 90 top
C326  22pF  [0402-TIGHT]  42.86,66.61 270 top
C327  2.2uF  [0402-TIGHT]  41.91,66.61 270 top
C328  2.4 pF  [0402_MURATA]  51.37,61.72 90 top
C329  9.1pF  [0402-TIGHT]  49.47,69.79 90 top
C330  100pF  [0402-TIGHT]  44.26,68.64 270 top
C331  2.2uF  [0402-TIGHT]  43.24,68.64 270 top
C332  10uF  [0402-TIGHT]  42.23,68.64 270 top
C333  100pF  [0402-TIGHT]  49.72,65.21 90 top
C334  2.2uF  [0402-TIGHT]  49.72,67.63 90 top
C335  22pF  [0402-TIGHT]  53.91,54.1 270 top
C336  0.1uF  [0402-TIGHT]  54.86,54.1 270 top
C337  0.1uF  [0402-TIGHT]  54.99,42.8 0 top
C338  10nF  [0402-TIGHT]  43.81,43.31 180 top
C339  1.0uF  [0402-TIGHT]  46.1,44.32 180 top
C340  2.2uF  [0402-TIGHT]  43.18,45.72 270 top
C341  0.1uF  [0402-TIGHT]  43.18,47.75 90 top
C342  1.0uF  [0402-TIGHT]  40.39,70.23 90 top
C343  0.1uF  [0402-TIGHT]  54.61,46.74 270 top
C344  100pF  [0402-TIGHT]  76.84,70.29 180 top
C345  100pF  [0402-TIGHT]  77.28,65.91 270 top
C346  100pF  [0402-TIGHT]  80.9,67.82 90 top
C347  1.0uF  [0402-TIGHT]  66.99,42.86 180 top
C348  1.0uF  [0402-TIGHT]  67.31,47.37 180 top
C349  2.2uF  [0402-TIGHT]  78.87,42.8 180 top
C350  100pF  [0402-TIGHT]  80.14,70.29 0 top
C351  100pF  [0402-TIGHT]  79.88,61.34 180 top
C352  22pF  [0402-TIGHT]  79.82,58.74 90 top
C353  0.1uF  [0402-TIGHT]  80.77,58.74 90 top
C354  22pF  [0402-TIGHT]  79.82,56.26 90 top
C355  0.1uF  [0402-TIGHT]  80.77,56.26 90 top
C356  22pF  [0402-TIGHT]  72.52,48.13 270 top
C357  0.1uF  [0402-TIGHT]  71.56,48.13 270 top
C358  22pF  [0402-TIGHT]  75.37,48.13 270 top
C359  0.1uF  [0402-TIGHT]  74.42,48.13 270 top
C360  22pF  [0402-TIGHT]  70.1,58.93 270 top
C361  0.1uF  [0402-TIGHT]  69.15,58.93 270 top
C362  22pF  [0402-TIGHT]  68.96,54.36 180 top
C363  0.1uF  [0402-TIGHT]  68.96,53.4 180 top
C364  1.0uF  [0402-TIGHT]  69.6,57.15 180 top
C365  47nF  [0402-TIGHT]  67.56,57.15 0 top
C366  1.0nF  [0402-TIGHT]  69.85,56.13 0 top
C367  100pF  [0402-TIGHT]  70.1,60.9 90 top
C368  1.0uF  [0402-TIGHT]  69.15,60.9 90 top
C369  10uF  [0402-TIGHT]  68.2,60.9 90 top
C370  100pF  [0402-TIGHT]  73.28,59.05 90 top
C371  100pF  [0402-TIGHT]  73.28,62.1 90 top
C372  100pF  [0402-TIGHT]  71.95,70.23 180 top
C373  100pF  [0402-TIGHT]  71.18,63.56 90 top
C374  2.2uF  [0402-TIGHT]  71.18,61.59 90 top
C375  22pF  [0402-TIGHT]  68.77,66.61 270 top
C376  2.2uF  [0402-TIGHT]  67.82,66.61 270 top
C377  2.4 pF  [0402_MURATA]  77.28,61.72 90 top
C378  9.1pF  [0402-TIGHT]  75.37,69.79 90 top
C379  100pF  [0402-TIGHT]  70.17,68.64 270 top
C380  2.2uF  [0402-TIGHT]  69.15,68.64 270 top
C381  10uF  [0402-TIGHT]  68.14,68.64 270 top
C382  100pF  [0402-TIGHT]  75.63,65.21 90 top
C383  2.2uF  [0402-TIGHT]  75.63,67.63 90 top
C384  22pF  [0402-TIGHT]  79.82,54.1 270 top
C385  0.1uF  [0402-TIGHT]  80.77,54.1 270 top
C386  0.1uF  [0402-TIGHT]  80.9,42.8 0 top
C387  10nF  [0402-TIGHT]  69.72,43.31 180 top
C388  1.0uF  [0402-TIGHT]  72.01,44.32 180 top
C389  2.2uF  [0402-TIGHT]  69.09,45.72 270 top
C390  0.1uF  [0402-TIGHT]  69.09,47.75 90 top
C391  1.0uF  [0402-TIGHT]  66.29,70.23 90 top
C392  0.1uF  [0402-TIGHT]  80.52,46.74 270 top
C393  100pF  [0402-TIGHT]  102.74,70.29 180 top
C394  100pF  [0402-TIGHT]  103.19,65.91 270 top
C395  100pF  [0402-TIGHT]  106.81,67.82 90 top
C396  1.0uF  [0402-TIGHT]  92.9,42.86 180 top
C397  1.0uF  [0402-TIGHT]  93.22,47.37 180 top
C398  2.2uF  [0402-TIGHT]  104.78,42.8 180 top
C399  100pF  [0402-TIGHT]  106.05,70.29 0 top
C400  100pF  [0402-TIGHT]  105.79,61.34 180 top
C401  22pF  [0402-TIGHT]  105.73,58.74 90 top
C402  0.1uF  [0402-TIGHT]  106.68,58.74 90 top
C403  22pF  [0402-TIGHT]  105.73,56.26 90 top
C404  0.1uF  [0402-TIGHT]  106.68,56.26 90 top
C405  22pF  [0402-TIGHT]  98.42,48.13 270 top
C406  0.1uF  [0402-TIGHT]  97.47,48.13 270 top
C407  22pF  [0402-TIGHT]  101.28,48.13 270 top
C408  0.1uF  [0402-TIGHT]  100.33,48.13 270 top
C409  22pF  [0402-TIGHT]  96.01,58.93 270 top
C410  0.1uF  [0402-TIGHT]  95.06,58.93 270 top
C411  22pF  [0402-TIGHT]  94.87,54.36 180 top
C412  0.1uF  [0402-TIGHT]  94.87,53.4 180 top
C413  1.0uF  [0402-TIGHT]  95.5,57.15 180 top
C414  47nF  [0402-TIGHT]  93.47,57.15 0 top
C415  1.0nF  [0402-TIGHT]  95.76,56.13 0 top
C416  100pF  [0402-TIGHT]  96.01,60.9 90 top
C417  1.0uF  [0402-TIGHT]  95.06,60.9 90 top
C418  10uF  [0402-TIGHT]  94.11,60.9 90 top
C419  100pF  [0402-TIGHT]  99.19,59.05 90 top
C420  100pF  [0402-TIGHT]  99.19,62.1 90 top
C421  100pF  [0402-TIGHT]  97.85,70.23 180 top
C422  100pF  [0402-TIGHT]  97.09,63.56 90 top
C423  2.2uF  [0402-TIGHT]  97.09,61.59 90 top
C424  22pF  [0402-TIGHT]  94.68,66.61 270 top
C425  2.2uF  [0402-TIGHT]  93.73,66.61 270 top
C426  2.4 pF  [0402_MURATA]  103.19,61.72 90 top
C427  9.1pF  [0402-TIGHT]  101.28,69.79 90 top
C428  100pF  [0402-TIGHT]  96.08,68.64 270 top
C429  2.2uF  [0402-TIGHT]  95.06,68.64 270 top
C430  10uF  [0402-TIGHT]  94.04,68.64 270 top
C431  100pF  [0402-TIGHT]  101.54,65.21 90 top
C432  2.2uF  [0402-TIGHT]  101.54,67.63 90 top
C433  22pF  [0402-TIGHT]  105.73,54.1 270 top
C434  0.1uF  [0402-TIGHT]  106.68,54.1 270 top
C435  0.1uF  [0402-TIGHT]  106.81,42.8 0 top
C436  10nF  [0402-TIGHT]  95.63,43.31 180 top
C437  1.0uF  [0402-TIGHT]  97.92,44.32 180 top
C438  2.2uF  [0402-TIGHT]  95,45.72 270 top
C439  0.1uF  [0402-TIGHT]  95,47.75 90 top
C440  1.0uF  [0402-TIGHT]  92.2,70.23 90 top
C441  0.1uF  [0402-TIGHT]  106.43,46.74 270 top
C442  100pF  [0402-TIGHT]  128.65,70.29 180 top
C443  100pF  [0402-TIGHT]  129.1,65.91 270 top
C444  100pF  [0402-TIGHT]  132.72,67.82 90 top
C445  1.0uF  [0402-TIGHT]  118.81,42.86 180 top
C446  1.0uF  [0402-TIGHT]  119.13,47.37 180 top
C447  2.2uF  [0402-TIGHT]  130.68,42.8 180 top
C448  100pF  [0402-TIGHT]  131.95,70.29 0 top
C449  100pF  [0402-TIGHT]  131.7,61.34 180 top
C450  22pF  [0402-TIGHT]  131.64,58.74 90 top
C451  0.1uF  [0402-TIGHT]  132.59,58.74 90 top
C452  22pF  [0402-TIGHT]  131.64,56.26 90 top
C453  0.1uF  [0402-TIGHT]  132.59,56.26 90 top
C454  22pF  [0402-TIGHT]  124.33,48.13 270 top
C455  0.1uF  [0402-TIGHT]  123.38,48.13 270 top
C456  22pF  [0402-TIGHT]  127.19,48.13 270 top
C457  0.1uF  [0402-TIGHT]  126.24,48.13 270 top
C458  22pF  [0402-TIGHT]  121.92,58.93 270 top
C459  0.1uF  [0402-TIGHT]  120.97,58.93 270 top
C460  22pF  [0402-TIGHT]  120.78,54.36 180 top
C461  0.1uF  [0402-TIGHT]  120.78,53.4 180 top
C462  1.0uF  [0402-TIGHT]  121.41,57.15 180 top
C463  47nF  [0402-TIGHT]  119.38,57.15 0 top
C464  1.0nF  [0402-TIGHT]  121.67,56.13 0 top
C465  100pF  [0402-TIGHT]  121.92,60.9 90 top
C466  1.0uF  [0402-TIGHT]  120.97,60.9 90 top
C467  10uF  [0402-TIGHT]  120.02,60.9 90 top
C468  100pF  [0402-TIGHT]  125.09,59.05 90 top
C469  100pF  [0402-TIGHT]  125.09,62.1 90 top
C470  100pF  [0402-TIGHT]  123.76,70.23 180 top
C471  100pF  [0402-TIGHT]  123,63.56 90 top
C472  2.2uF  [0402-TIGHT]  123,61.59 90 top
C473  22pF  [0402-TIGHT]  120.59,66.61 270 top
C474  2.2uF  [0402-TIGHT]  119.63,66.61 270 top
C475  2.4 pF  [0402_MURATA]  129.1,61.72 90 top
C476  9.1pF  [0402-TIGHT]  127.19,69.79 90 top
C477  100pF  [0402-TIGHT]  121.98,68.64 270 top
C478  2.2uF  [0402-TIGHT]  120.97,68.64 270 top
C479  10uF  [0402-TIGHT]  119.95,68.64 270 top
C480  100pF  [0402-TIGHT]  127.44,65.21 90 top
C481  2.2uF  [0402-TIGHT]  127.44,67.63 90 top
C482  22pF  [0402-TIGHT]  131.64,54.1 270 top
C483  0.1uF  [0402-TIGHT]  132.59,54.1 270 top
C484  0.1uF  [0402-TIGHT]  132.72,42.8 0 top
C485  10nF  [0402-TIGHT]  121.54,43.31 180 top
C486  1.0uF  [0402-TIGHT]  123.83,44.32 180 top
C487  2.2uF  [0402-TIGHT]  120.9,45.72 270 top
C488  0.1uF  [0402-TIGHT]  120.9,47.75 90 top
C489  1.0uF  [0402-TIGHT]  118.11,70.23 90 top
C490  0.1uF  [0402-TIGHT]  132.33,46.74 270 top
C491  100pF  [0402-TIGHT]  25.02,103.82 180 top
C492  100pF  [0402-TIGHT]  25.46,99.44 270 top
C493  100pF  [0402-TIGHT]  29.08,101.35 90 top
C494  1.0uF  [0402-TIGHT]  15.18,76.39 180 top
C495  1.0uF  [0402-TIGHT]  15.49,80.9 180 top
C496  2.2uF  [0402-TIGHT]  27.05,76.33 180 top
C497  100pF  [0402-TIGHT]  28.32,103.82 0 top
C498  100pF  [0402-TIGHT]  28.07,94.87 180 top
C499  22pF  [0402-TIGHT]  28,92.27 90 top
C500  0.1uF  [0402-TIGHT]  28.96,92.27 90 top
C501  22pF  [0402-TIGHT]  28,89.79 90 top
C502  0.1uF  [0402-TIGHT]  28.96,89.79 90 top
C503  22pF  [0402-TIGHT]  20.7,81.66 270 top
C504  0.1uF  [0402-TIGHT]  19.75,81.66 270 top
C505  22pF  [0402-TIGHT]  23.56,81.66 270 top
C506  0.1uF  [0402-TIGHT]  22.61,81.66 270 top
C507  22pF  [0402-TIGHT]  18.29,92.46 270 top
C508  0.1uF  [0402-TIGHT]  17.34,92.46 270 top
C509  22pF  [0402-TIGHT]  17.14,87.88 180 top
C510  0.1uF  [0402-TIGHT]  17.14,86.93 180 top
C511  1.0uF  [0402-TIGHT]  17.78,90.68 180 top
C512  47nF  [0402-TIGHT]  15.75,90.68 0 top
C513  1.0nF  [0402-TIGHT]  18.03,89.66 0 top
C514  100pF  [0402-TIGHT]  18.29,94.42 90 top
C515  1.0uF  [0402-TIGHT]  17.34,94.42 90 top
C516  10uF  [0402-TIGHT]  16.38,94.42 90 top
C517  100pF  [0402-TIGHT]  21.46,92.58 90 top
C518  100pF  [0402-TIGHT]  21.46,95.63 90 top
C519  100pF  [0402-TIGHT]  20.13,103.76 180 top
C520  100pF  [0402-TIGHT]  19.37,97.09 90 top
C521  2.2uF  [0402-TIGHT]  19.37,95.12 90 top
C522  22pF  [0402-TIGHT]  16.95,100.14 270 top
C523  2.2uF  [0402-TIGHT]  16,100.14 270 top
C524  2.4 pF  [0402_MURATA]  25.46,95.25 90 top
C525  9.1pF  [0402-TIGHT]  23.56,103.31 90 top
C526  100pF  [0402-TIGHT]  18.35,102.17 270 top
C527  2.2uF  [0402-TIGHT]  17.34,102.17 270 top
C528  10uF  [0402-TIGHT]  16.32,102.17 270 top
C529  100pF  [0402-TIGHT]  23.81,98.74 90 top
C530  2.2uF  [0402-TIGHT]  23.81,101.16 90 top
C531  22pF  [0402-TIGHT]  28,87.63 270 top
C532  0.1uF  [0402-TIGHT]  28.96,87.63 270 top
C533  0.1uF  [0402-TIGHT]  29.08,76.33 0 top
C534  10nF  [0402-TIGHT]  17.91,76.84 180 top
C535  1.0uF  [0402-TIGHT]  20.19,77.85 180 top
C536  2.2uF  [0402-TIGHT]  17.27,79.25 270 top
C537  0.1uF  [0402-TIGHT]  17.27,81.28 90 top
C538  1.0uF  [0402-TIGHT]  14.48,103.76 90 top
C539  0.1uF  [0402-TIGHT]  28.7,80.26 270 top
C540  100pF  [0402-TIGHT]  50.93,103.82 180 top
C541  100pF  [0402-TIGHT]  51.37,99.44 270 top
C542  100pF  [0402-TIGHT]  54.99,101.35 90 top
C543  1.0uF  [0402-TIGHT]  41.08,76.39 180 top
C544  1.0uF  [0402-TIGHT]  41.4,80.9 180 top
C545  2.2uF  [0402-TIGHT]  52.96,76.33 180 top
C546  100pF  [0402-TIGHT]  54.23,103.82 0 top
C547  100pF  [0402-TIGHT]  53.98,94.87 180 top
C548  22pF  [0402-TIGHT]  53.91,92.27 90 top
C549  0.1uF  [0402-TIGHT]  54.86,92.27 90 top
C550  22pF  [0402-TIGHT]  53.91,89.79 90 top
C551  0.1uF  [0402-TIGHT]  54.86,89.79 90 top
C552  22pF  [0402-TIGHT]  46.61,81.66 270 top
C553  0.1uF  [0402-TIGHT]  45.66,81.66 270 top
C554  22pF  [0402-TIGHT]  49.47,81.66 270 top
C555  0.1uF  [0402-TIGHT]  48.51,81.66 270 top
C556  22pF  [0402-TIGHT]  44.2,92.46 270 top
C557  0.1uF  [0402-TIGHT]  43.24,92.46 270 top
C558  22pF  [0402-TIGHT]  43.05,87.88 180 top
C559  0.1uF  [0402-TIGHT]  43.05,86.93 180 top
C560  1.0uF  [0402-TIGHT]  43.69,90.68 180 top
C561  47nF  [0402-TIGHT]  41.66,90.68 0 top
C562  1.0nF  [0402-TIGHT]  43.94,89.66 0 top
C563  100pF  [0402-TIGHT]  44.2,94.42 90 top
C564  1.0uF  [0402-TIGHT]  43.24,94.42 90 top
C565  10uF  [0402-TIGHT]  42.29,94.42 90 top
C566  100pF  [0402-TIGHT]  47.37,92.58 90 top
C567  100pF  [0402-TIGHT]  47.37,95.63 90 top
C568  100pF  [0402-TIGHT]  46.04,103.76 180 top
C569  100pF  [0402-TIGHT]  45.28,97.09 90 top
C570  2.2uF  [0402-TIGHT]  45.28,95.12 90 top
C571  22pF  [0402-TIGHT]  42.86,100.14 270 top
C572  2.2uF  [0402-TIGHT]  41.91,100.14 270 top
C573  2.4 pF  [0402_MURATA]  51.37,95.25 90 top
C574  9.1pF  [0402-TIGHT]  49.47,103.31 90 top
C575  100pF  [0402-TIGHT]  44.26,102.17 270 top
C576  2.2uF  [0402-TIGHT]  43.24,102.17 270 top
C577  10uF  [0402-TIGHT]  42.23,102.17 270 top
C578  100pF  [0402-TIGHT]  49.72,98.74 90 top
C579  2.2uF  [0402-TIGHT]  49.72,101.16 90 top
C580  22pF  [0402-TIGHT]  53.91,87.63 270 top
C581  0.1uF  [0402-TIGHT]  54.86,87.63 270 top
C582  0.1uF  [0402-TIGHT]  54.99,76.33 0 top
C583  10nF  [0402-TIGHT]  43.81,76.84 180 top
C584  1.0uF  [0402-TIGHT]  46.1,77.85 180 top
C585  2.2uF  [0402-TIGHT]  43.18,79.25 270 top
C586  0.1uF  [0402-TIGHT]  43.18,81.28 90 top
C587  1.0uF  [0402-TIGHT]  40.39,103.76 90 top
C588  0.1uF  [0402-TIGHT]  54.61,80.26 270 top
C589  100pF  [0402-TIGHT]  76.84,103.82 180 top
C590  100pF  [0402-TIGHT]  77.28,99.44 270 top
C591  100pF  [0402-TIGHT]  80.9,101.35 90 top
C592  1.0uF  [0402-TIGHT]  66.99,76.39 180 top
C593  1.0uF  [0402-TIGHT]  67.31,80.9 180 top
C594  2.2uF  [0402-TIGHT]  78.87,76.33 180 top
C595  100pF  [0402-TIGHT]  80.14,103.82 0 top
C596  100pF  [0402-TIGHT]  79.88,94.87 180 top
C597  22pF  [0402-TIGHT]  79.82,92.27 90 top
C598  0.1uF  [0402-TIGHT]  80.77,92.27 90 top
C599  22pF  [0402-TIGHT]  79.82,89.79 90 top
C600  0.1uF  [0402-TIGHT]  80.77,89.79 90 top
C601  22pF  [0402-TIGHT]  72.52,81.66 270 top
C602  0.1uF  [0402-TIGHT]  71.56,81.66 270 top
C603  22pF  [0402-TIGHT]  75.37,81.66 270 top
C604  0.1uF  [0402-TIGHT]  74.42,81.66 270 top
C605  22pF  [0402-TIGHT]  70.1,92.46 270 top
C606  0.1uF  [0402-TIGHT]  69.15,92.46 270 top
C607  22pF  [0402-TIGHT]  68.96,87.88 180 top
C608  0.1uF  [0402-TIGHT]  68.96,86.93 180 top
C609  1.0uF  [0402-TIGHT]  69.6,90.68 180 top
C610  47nF  [0402-TIGHT]  67.56,90.68 0 top
C611  1.0nF  [0402-TIGHT]  69.85,89.66 0 top
C612  100pF  [0402-TIGHT]  70.1,94.42 90 top
C613  1.0uF  [0402-TIGHT]  69.15,94.42 90 top
C614  10uF  [0402-TIGHT]  68.2,94.42 90 top
C615  100pF  [0402-TIGHT]  73.28,92.58 90 top
C616  100pF  [0402-TIGHT]  73.28,95.63 90 top
C617  100pF  [0402-TIGHT]  71.95,103.76 180 top
C618  100pF  [0402-TIGHT]  71.18,97.09 90 top
C619  2.2uF  [0402-TIGHT]  71.18,95.12 90 top
C620  22pF  [0402-TIGHT]  68.77,100.14 270 top
C621  2.2uF  [0402-TIGHT]  67.82,100.14 270 top
C622  2.4 pF  [0402_MURATA]  77.28,95.25 90 top
C623  9.1pF  [0402-TIGHT]  75.37,103.31 90 top
C624  100pF  [0402-TIGHT]  70.17,102.17 270 top
C625  2.2uF  [0402-TIGHT]  69.15,102.17 270 top
C626  10uF  [0402-TIGHT]  68.14,102.17 270 top
C627  100pF  [0402-TIGHT]  75.63,98.74 90 top
C628  2.2uF  [0402-TIGHT]  75.63,101.16 90 top
C629  22pF  [0402-TIGHT]  79.82,87.63 270 top
C630  0.1uF  [0402-TIGHT]  80.77,87.63 270 top
C631  0.1uF  [0402-TIGHT]  80.9,76.33 0 top
C632  10nF  [0402-TIGHT]  69.72,76.84 180 top
C633  1.0uF  [0402-TIGHT]  72.01,77.85 180 top
C634  2.2uF  [0402-TIGHT]  69.09,79.25 270 top
C635  0.1uF  [0402-TIGHT]  69.09,81.28 90 top
C636  1.0uF  [0402-TIGHT]  66.29,103.76 90 top
C637  0.1uF  [0402-TIGHT]  80.52,80.26 270 top
C638  100pF  [0402-TIGHT]  102.74,103.82 180 top
C639  100pF  [0402-TIGHT]  103.19,99.44 270 top
C640  100pF  [0402-TIGHT]  106.81,101.35 90 top
C641  1.0uF  [0402-TIGHT]  92.9,76.39 180 top
C642  1.0uF  [0402-TIGHT]  93.22,80.9 180 top
C643  2.2uF  [0402-TIGHT]  104.78,76.33 180 top
C644  100pF  [0402-TIGHT]  106.05,103.82 0 top
C645  100pF  [0402-TIGHT]  105.79,94.87 180 top
C646  22pF  [0402-TIGHT]  105.73,92.27 90 top
C647  0.1uF  [0402-TIGHT]  106.68,92.27 90 top
C648  22pF  [0402-TIGHT]  105.73,89.79 90 top
C649  0.1uF  [0402-TIGHT]  106.68,89.79 90 top
C650  22pF  [0402-TIGHT]  98.42,81.66 270 top
C651  0.1uF  [0402-TIGHT]  97.47,81.66 270 top
C652  22pF  [0402-TIGHT]  101.28,81.66 270 top
C653  0.1uF  [0402-TIGHT]  100.33,81.66 270 top
C654  22pF  [0402-TIGHT]  96.01,92.46 270 top
C655  0.1uF  [0402-TIGHT]  95.06,92.46 270 top
C656  22pF  [0402-TIGHT]  94.87,87.88 180 top
C657  0.1uF  [0402-TIGHT]  94.87,86.93 180 top
C658  1.0uF  [0402-TIGHT]  95.5,90.68 180 top
C659  47nF  [0402-TIGHT]  93.47,90.68 0 top
C660  1.0nF  [0402-TIGHT]  95.76,89.66 0 top
C661  100pF  [0402-TIGHT]  96.01,94.42 90 top
C662  1.0uF  [0402-TIGHT]  95.06,94.42 90 top
C663  10uF  [0402-TIGHT]  94.11,94.42 90 top
C664  100pF  [0402-TIGHT]  99.19,92.58 90 top
C665  100pF  [0402-TIGHT]  99.19,95.63 90 top
C666  100pF  [0402-TIGHT]  97.85,103.76 180 top
C667  100pF  [0402-TIGHT]  97.09,97.09 90 top
C668  2.2uF  [0402-TIGHT]  97.09,95.12 90 top
C669  22pF  [0402-TIGHT]  94.68,100.14 270 top
C670  2.2uF  [0402-TIGHT]  93.73,100.14 270 top
C671  2.4 pF  [0402_MURATA]  103.19,95.25 90 top
C672  9.1pF  [0402-TIGHT]  101.28,103.31 90 top
C673  100pF  [0402-TIGHT]  96.08,102.17 270 top
C674  2.2uF  [0402-TIGHT]  95.06,102.17 270 top
C675  10uF  [0402-TIGHT]  94.04,102.17 270 top
C676  100pF  [0402-TIGHT]  101.54,98.74 90 top
C677  2.2uF  [0402-TIGHT]  101.54,101.16 90 top
C678  22pF  [0402-TIGHT]  105.73,87.63 270 top
C679  0.1uF  [0402-TIGHT]  106.68,87.63 270 top
C680  0.1uF  [0402-TIGHT]  106.81,76.33 0 top
C681  10nF  [0402-TIGHT]  95.63,76.84 180 top
C682  1.0uF  [0402-TIGHT]  97.92,77.85 180 top
C683  2.2uF  [0402-TIGHT]  95,79.25 270 top
C684  0.1uF  [0402-TIGHT]  95,81.28 90 top
C685  1.0uF  [0402-TIGHT]  92.2,103.76 90 top
C686  0.1uF  [0402-TIGHT]  106.43,80.26 270 top
C687  100pF  [0402-TIGHT]  128.65,103.82 180 top
C688  100pF  [0402-TIGHT]  129.1,99.44 270 top
C689  100pF  [0402-TIGHT]  132.72,101.35 90 top
C690  1.0uF  [0402-TIGHT]  118.81,76.39 180 top
C691  1.0uF  [0402-TIGHT]  119.13,80.9 180 top
C692  2.2uF  [0402-TIGHT]  130.68,76.33 180 top
C693  100pF  [0402-TIGHT]  131.95,103.82 0 top
C694  100pF  [0402-TIGHT]  131.7,94.87 180 top
C695  22pF  [0402-TIGHT]  131.64,92.27 90 top
C696  0.1uF  [0402-TIGHT]  132.59,92.27 90 top
C697  22pF  [0402-TIGHT]  131.64,89.79 90 top
C698  0.1uF  [0402-TIGHT]  132.59,89.79 90 top
C699  22pF  [0402-TIGHT]  124.33,81.66 270 top
C700  0.1uF  [0402-TIGHT]  123.38,81.66 270 top
C701  22pF  [0402-TIGHT]  127.19,81.66 270 top
C702  0.1uF  [0402-TIGHT]  126.24,81.66 270 top
C703  22pF  [0402-TIGHT]  121.92,92.46 270 top
C704  0.1uF  [0402-TIGHT]  120.97,92.46 270 top
C705  22pF  [0402-TIGHT]  120.78,87.88 180 top
C706  0.1uF  [0402-TIGHT]  120.78,86.93 180 top
C707  1.0uF  [0402-TIGHT]  121.41,90.68 180 top
C708  47nF  [0402-TIGHT]  119.38,90.68 0 top
C709  1.0nF  [0402-TIGHT]  121.67,89.66 0 top
C710  100pF  [0402-TIGHT]  121.92,94.42 90 top
C711  1.0uF  [0402-TIGHT]  120.97,94.42 90 top
C712  10uF  [0402-TIGHT]  120.02,94.42 90 top
C713  100pF  [0402-TIGHT]  125.09,92.58 90 top
C714  100pF  [0402-TIGHT]  125.09,95.63 90 top
C715  100pF  [0402-TIGHT]  123.76,103.76 180 top
C716  100pF  [0402-TIGHT]  123,97.09 90 top
C717  2.2uF  [0402-TIGHT]  123,95.12 90 top
C718  22pF  [0402-TIGHT]  120.59,100.14 270 top
C719  2.2uF  [0402-TIGHT]  119.63,100.14 270 top
C720  2.4 pF  [0402_MURATA]  129.1,95.25 90 top
C721  9.1pF  [0402-TIGHT]  127.19,103.31 90 top
C722  100pF  [0402-TIGHT]  121.98,102.17 270 top
C723  2.2uF  [0402-TIGHT]  120.97,102.17 270 top
C724  10uF  [0402-TIGHT]  119.95,102.17 270 top
C725  100pF  [0402-TIGHT]  127.44,98.74 90 top
C726  2.2uF  [0402-TIGHT]  127.44,101.16 90 top
C727  22pF  [0402-TIGHT]  131.64,87.63 270 top
C728  0.1uF  [0402-TIGHT]  132.59,87.63 270 top
C729  0.1uF  [0402-TIGHT]  132.72,76.33 0 top
C730  10nF  [0402-TIGHT]  121.54,76.84 180 top
C731  1.0uF  [0402-TIGHT]  123.83,77.85 180 top
C732  2.2uF  [0402-TIGHT]  120.9,79.25 270 top
C733  0.1uF  [0402-TIGHT]  120.9,81.28 90 top
C734  1.0uF  [0402-TIGHT]  118.11,103.76 90 top
C735  0.1uF  [0402-TIGHT]  132.33,80.26 270 top
C736  100pF  [0402-TIGHT]  25.02,137.35 180 top
C737  100pF  [0402-TIGHT]  25.46,132.97 270 top
C738  100pF  [0402-TIGHT]  29.08,134.87 90 top
C739  1.0uF  [0402-TIGHT]  15.18,109.92 180 top
C740  1.0uF  [0402-TIGHT]  15.49,114.43 180 top
C741  2.2uF  [0402-TIGHT]  27.05,109.86 180 top
C742  100pF  [0402-TIGHT]  28.32,137.35 0 top
C743  100pF  [0402-TIGHT]  28.07,128.4 180 top
C744  22pF  [0402-TIGHT]  28,125.79 90 top
C745  0.1uF  [0402-TIGHT]  28.96,125.79 90 top
C746  22pF  [0402-TIGHT]  28,123.32 90 top
C747  0.1uF  [0402-TIGHT]  28.96,123.32 90 top
C748  22pF  [0402-TIGHT]  20.7,115.19 270 top
C749  0.1uF  [0402-TIGHT]  19.75,115.19 270 top
C750  22pF  [0402-TIGHT]  23.56,115.19 270 top
C751  0.1uF  [0402-TIGHT]  22.61,115.19 270 top
C752  22pF  [0402-TIGHT]  18.29,125.98 270 top
C753  0.1uF  [0402-TIGHT]  17.34,125.98 270 top
C754  22pF  [0402-TIGHT]  17.14,121.41 180 top
C755  0.1uF  [0402-TIGHT]  17.14,120.46 180 top
C756  1.0uF  [0402-TIGHT]  17.78,124.21 180 top
C757  47nF  [0402-TIGHT]  15.75,124.21 0 top
C758  1.0nF  [0402-TIGHT]  18.03,123.19 0 top
C759  100pF  [0402-TIGHT]  18.29,127.95 90 top
C760  1.0uF  [0402-TIGHT]  17.34,127.95 90 top
C761  10uF  [0402-TIGHT]  16.38,127.95 90 top
C762  100pF  [0402-TIGHT]  21.46,126.11 90 top
C763  100pF  [0402-TIGHT]  21.46,129.16 90 top
C764  100pF  [0402-TIGHT]  20.13,137.29 180 top
C765  100pF  [0402-TIGHT]  19.37,130.62 90 top
C766  2.2uF  [0402-TIGHT]  19.37,128.65 90 top
C767  22pF  [0402-TIGHT]  16.95,133.67 270 top
C768  2.2uF  [0402-TIGHT]  16,133.67 270 top
C769  2.4 pF  [0402_MURATA]  25.46,128.78 90 top
C770  9.1pF  [0402-TIGHT]  23.56,136.84 90 top
C771  100pF  [0402-TIGHT]  18.35,135.7 270 top
C772  2.2uF  [0402-TIGHT]  17.34,135.7 270 top
C773  10uF  [0402-TIGHT]  16.32,135.7 270 top
C774  100pF  [0402-TIGHT]  23.81,132.27 90 top
C775  2.2uF  [0402-TIGHT]  23.81,134.68 90 top
C776  22pF  [0402-TIGHT]  28,121.16 270 top
C777  0.1uF  [0402-TIGHT]  28.96,121.16 270 top
C778  0.1uF  [0402-TIGHT]  29.08,109.86 0 top
C779  10nF  [0402-TIGHT]  17.91,110.36 180 top
C780  1.0uF  [0402-TIGHT]  20.19,111.38 180 top
C781  2.2uF  [0402-TIGHT]  17.27,112.78 270 top
C782  0.1uF  [0402-TIGHT]  17.27,114.81 90 top
C783  1.0uF  [0402-TIGHT]  14.48,137.29 90 top
C784  0.1uF  [0402-TIGHT]  28.7,113.79 270 top
C785  100pF  [0402-TIGHT]  50.93,137.35 180 top
C786  100pF  [0402-TIGHT]  51.37,132.97 270 top
C787  100pF  [0402-TIGHT]  54.99,134.87 90 top
C788  1.0uF  [0402-TIGHT]  41.08,109.92 180 top
C789  1.0uF  [0402-TIGHT]  41.4,114.43 180 top
C790  2.2uF  [0402-TIGHT]  52.96,109.86 180 top
C791  100pF  [0402-TIGHT]  54.23,137.35 0 top
C792  100pF  [0402-TIGHT]  53.98,128.4 180 top
C793  22pF  [0402-TIGHT]  53.91,125.79 90 top
C794  0.1uF  [0402-TIGHT]  54.86,125.79 90 top
C795  22pF  [0402-TIGHT]  53.91,123.32 90 top
C796  0.1uF  [0402-TIGHT]  54.86,123.32 90 top
C797  22pF  [0402-TIGHT]  46.61,115.19 270 top
C798  0.1uF  [0402-TIGHT]  45.66,115.19 270 top
C799  22pF  [0402-TIGHT]  49.47,115.19 270 top
C800  0.1uF  [0402-TIGHT]  48.51,115.19 270 top
C801  22pF  [0402-TIGHT]  44.2,125.98 270 top
C802  0.1uF  [0402-TIGHT]  43.24,125.98 270 top
C803  22pF  [0402-TIGHT]  43.05,121.41 180 top
C804  0.1uF  [0402-TIGHT]  43.05,120.46 180 top
C805  1.0uF  [0402-TIGHT]  43.69,124.21 180 top
C806  47nF  [0402-TIGHT]  41.66,124.21 0 top
C807  1.0nF  [0402-TIGHT]  43.94,123.19 0 top
C808  100pF  [0402-TIGHT]  44.2,127.95 90 top
C809  1.0uF  [0402-TIGHT]  43.24,127.95 90 top
C810  10uF  [0402-TIGHT]  42.29,127.95 90 top
C811  100pF  [0402-TIGHT]  47.37,126.11 90 top
C812  100pF  [0402-TIGHT]  47.37,129.16 90 top
C813  100pF  [0402-TIGHT]  46.04,137.29 180 top
C814  100pF  [0402-TIGHT]  45.28,130.62 90 top
C815  2.2uF  [0402-TIGHT]  45.28,128.65 90 top
C816  22pF  [0402-TIGHT]  42.86,133.67 270 top
C817  2.2uF  [0402-TIGHT]  41.91,133.67 270 top
C818  2.4 pF  [0402_MURATA]  51.37,128.78 90 top
C819  9.1pF  [0402-TIGHT]  49.47,136.84 90 top
C820  100pF  [0402-TIGHT]  44.26,135.7 270 top
C821  2.2uF  [0402-TIGHT]  43.24,135.7 270 top
C822  10uF  [0402-TIGHT]  42.23,135.7 270 top
C823  100pF  [0402-TIGHT]  49.72,132.27 90 top
C824  2.2uF  [0402-TIGHT]  49.72,134.68 90 top
C825  22pF  [0402-TIGHT]  53.91,121.16 270 top
C826  0.1uF  [0402-TIGHT]  54.86,121.16 270 top
C827  0.1uF  [0402-TIGHT]  54.99,109.86 0 top
C828  10nF  [0402-TIGHT]  43.81,110.36 180 top
C829  1.0uF  [0402-TIGHT]  46.1,111.38 180 top
C830  2.2uF  [0402-TIGHT]  43.18,112.78 270 top
C831  0.1uF  [0402-TIGHT]  43.18,114.81 90 top
C832  1.0uF  [0402-TIGHT]  40.39,137.29 90 top
C833  0.1uF  [0402-TIGHT]  54.61,113.79 270 top
C834  100pF  [0402-TIGHT]  76.84,137.35 180 top
C835  100pF  [0402-TIGHT]  77.28,132.97 270 top
C836  100pF  [0402-TIGHT]  80.9,134.87 90 top
C837  1.0uF  [0402-TIGHT]  66.99,109.92 180 top
C838  1.0uF  [0402-TIGHT]  67.31,114.43 180 top
C839  2.2uF  [0402-TIGHT]  78.87,109.86 180 top
C840  100pF  [0402-TIGHT]  80.14,137.35 0 top
C841  100pF  [0402-TIGHT]  79.88,128.4 180 top
C842  22pF  [0402-TIGHT]  79.82,125.79 90 top
C843  0.1uF  [0402-TIGHT]  80.77,125.79 90 top
C844  22pF  [0402-TIGHT]  79.82,123.32 90 top
C845  0.1uF  [0402-TIGHT]  80.77,123.32 90 top
C846  22pF  [0402-TIGHT]  72.52,115.19 270 top
C847  0.1uF  [0402-TIGHT]  71.56,115.19 270 top
C848  22pF  [0402-TIGHT]  75.37,115.19 270 top
C849  0.1uF  [0402-TIGHT]  74.42,115.19 270 top
C850  22pF  [0402-TIGHT]  70.1,125.98 270 top
C851  0.1uF  [0402-TIGHT]  69.15,125.98 270 top
C852  22pF  [0402-TIGHT]  68.96,121.41 180 top
C853  0.1uF  [0402-TIGHT]  68.96,120.46 180 top
C854  1.0uF  [0402-TIGHT]  69.6,124.21 180 top
C855  47nF  [0402-TIGHT]  67.56,124.21 0 top
C856  1.0nF  [0402-TIGHT]  69.85,123.19 0 top
C857  100pF  [0402-TIGHT]  70.1,127.95 90 top
C858  1.0uF  [0402-TIGHT]  69.15,127.95 90 top
C859  10uF  [0402-TIGHT]  68.2,127.95 90 top
C860  100pF  [0402-TIGHT]  73.28,126.11 90 top
C861  100pF  [0402-TIGHT]  73.28,129.16 90 top
C862  100pF  [0402-TIGHT]  71.95,137.29 180 top
C863  100pF  [0402-TIGHT]  71.18,130.62 90 top
C864  2.2uF  [0402-TIGHT]  71.18,128.65 90 top
C865  22pF  [0402-TIGHT]  68.77,133.67 270 top
C866  2.2uF  [0402-TIGHT]  67.82,133.67 270 top
C867  2.4 pF  [0402_MURATA]  77.28,128.78 90 top
C868  9.1pF  [0402-TIGHT]  75.37,136.84 90 top
C869  100pF  [0402-TIGHT]  70.17,135.7 270 top
C870  2.2uF  [0402-TIGHT]  69.15,135.7 270 top
C871  10uF  [0402-TIGHT]  68.14,135.7 270 top
C872  100pF  [0402-TIGHT]  75.63,132.27 90 top
C873  2.2uF  [0402-TIGHT]  75.63,134.68 90 top
C874  22pF  [0402-TIGHT]  79.82,121.16 270 top
C875  0.1uF  [0402-TIGHT]  80.77,121.16 270 top
C876  0.1uF  [0402-TIGHT]  80.9,109.86 0 top
C877  10nF  [0402-TIGHT]  69.72,110.36 180 top
C878  1.0uF  [0402-TIGHT]  72.01,111.38 180 top
C879  2.2uF  [0402-TIGHT]  69.09,112.78 270 top
C880  0.1uF  [0402-TIGHT]  69.09,114.81 90 top
C881  1.0uF  [0402-TIGHT]  66.29,137.29 90 top
C882  0.1uF  [0402-TIGHT]  80.52,113.79 270 top
C883  100pF  [0402-TIGHT]  102.74,137.35 180 top
C884  100pF  [0402-TIGHT]  103.19,132.97 270 top
C885  100pF  [0402-TIGHT]  106.81,134.87 90 top
C886  1.0uF  [0402-TIGHT]  92.9,109.92 180 top
C887  1.0uF  [0402-TIGHT]  93.22,114.43 180 top
C888  2.2uF  [0402-TIGHT]  104.78,109.86 180 top
C889  100pF  [0402-TIGHT]  106.05,137.35 0 top
C890  100pF  [0402-TIGHT]  105.79,128.4 180 top
C891  22pF  [0402-TIGHT]  105.73,125.79 90 top
C892  0.1uF  [0402-TIGHT]  106.68,125.79 90 top
C893  22pF  [0402-TIGHT]  105.73,123.32 90 top
C894  0.1uF  [0402-TIGHT]  106.68,123.32 90 top
C895  22pF  [0402-TIGHT]  98.42,115.19 270 top
C896  0.1uF  [0402-TIGHT]  97.47,115.19 270 top
C897  22pF  [0402-TIGHT]  101.28,115.19 270 top
C898  0.1uF  [0402-TIGHT]  100.33,115.19 270 top
C899  22pF  [0402-TIGHT]  96.01,125.98 270 top
C900  0.1uF  [0402-TIGHT]  95.06,125.98 270 top
C901  22pF  [0402-TIGHT]  94.87,121.41 180 top
C902  0.1uF  [0402-TIGHT]  94.87,120.46 180 top
C903  1.0uF  [0402-TIGHT]  95.5,124.21 180 top
C904  47nF  [0402-TIGHT]  93.47,124.21 0 top
C905  1.0nF  [0402-TIGHT]  95.76,123.19 0 top
C906  100pF  [0402-TIGHT]  96.01,127.95 90 top
C907  1.0uF  [0402-TIGHT]  95.06,127.95 90 top
C908  10uF  [0402-TIGHT]  94.11,127.95 90 top
C909  100pF  [0402-TIGHT]  99.19,126.11 90 top
C910  100pF  [0402-TIGHT]  99.19,129.16 90 top
C911  100pF  [0402-TIGHT]  97.85,137.29 180 top
C912  100pF  [0402-TIGHT]  97.09,130.62 90 top
C913  2.2uF  [0402-TIGHT]  97.09,128.65 90 top
C914  22pF  [0402-TIGHT]  94.68,133.67 270 top
C915  2.2uF  [0402-TIGHT]  93.73,133.67 270 top
C916  2.4 pF  [0402_MURATA]  103.19,128.78 90 top
C917  9.1pF  [0402-TIGHT]  101.28,136.84 90 top
C918  100pF  [0402-TIGHT]  96.08,135.7 270 top
C919  2.2uF  [0402-TIGHT]  95.06,135.7 270 top
C920  10uF  [0402-TIGHT]  94.04,135.7 270 top
C921  100pF  [0402-TIGHT]  101.54,132.27 90 top
C922  2.2uF  [0402-TIGHT]  101.54,134.68 90 top
C923  22pF  [0402-TIGHT]  105.73,121.16 270 top
C924  0.1uF  [0402-TIGHT]  106.68,121.16 270 top
C925  0.1uF  [0402-TIGHT]  106.81,109.86 0 top
C926  10nF  [0402-TIGHT]  95.63,110.36 180 top
C927  1.0uF  [0402-TIGHT]  97.92,111.38 180 top
C928  2.2uF  [0402-TIGHT]  95,112.78 270 top
C929  0.1uF  [0402-TIGHT]  95,114.81 90 top
C930  1.0uF  [0402-TIGHT]  92.2,137.29 90 top
C931  0.1uF  [0402-TIGHT]  106.43,113.79 270 top
C932  100pF  [0402-TIGHT]  128.65,137.35 180 top
C933  100pF  [0402-TIGHT]  129.1,132.97 270 top
C934  100pF  [0402-TIGHT]  132.72,134.87 90 top
C935  1.0uF  [0402-TIGHT]  118.81,109.92 180 top
C936  1.0uF  [0402-TIGHT]  119.13,114.43 180 top
C937  2.2uF  [0402-TIGHT]  130.68,109.86 180 top
C938  100pF  [0402-TIGHT]  131.95,137.35 0 top
C939  100pF  [0402-TIGHT]  131.7,128.4 180 top
C940  22pF  [0402-TIGHT]  131.64,125.79 90 top
C941  0.1uF  [0402-TIGHT]  132.59,125.79 90 top
C942  22pF  [0402-TIGHT]  131.64,123.32 90 top
C943  0.1uF  [0402-TIGHT]  132.59,123.32 90 top
C944  22pF  [0402-TIGHT]  124.33,115.19 270 top
C945  0.1uF  [0402-TIGHT]  123.38,115.19 270 top
C946  22pF  [0402-TIGHT]  127.19,115.19 270 top
C947  0.1uF  [0402-TIGHT]  126.24,115.19 270 top
C948  22pF  [0402-TIGHT]  121.92,125.98 270 top
C949  0.1uF  [0402-TIGHT]  120.97,125.98 270 top
C950  22pF  [0402-TIGHT]  120.78,121.41 180 top
C951  0.1uF  [0402-TIGHT]  120.78,120.46 180 top
C952  1.0uF  [0402-TIGHT]  121.41,124.21 180 top
C953  47nF  [0402-TIGHT]  119.38,124.21 0 top
C954  1.0nF  [0402-TIGHT]  121.67,123.19 0 top
C955  100pF  [0402-TIGHT]  121.92,127.95 90 top
C956  1.0uF  [0402-TIGHT]  120.97,127.95 90 top
C957  10uF  [0402-TIGHT]  120.02,127.95 90 top
C958  100pF  [0402-TIGHT]  125.09,126.11 90 top
C959  100pF  [0402-TIGHT]  125.09,129.16 90 top
C960  100pF  [0402-TIGHT]  123.76,137.29 180 top
C961  100pF  [0402-TIGHT]  123,130.62 90 top
C962  2.2uF  [0402-TIGHT]  123,128.65 90 top
C963  22pF  [0402-TIGHT]  120.59,133.67 270 top
C964  2.2uF  [0402-TIGHT]  119.63,133.67 270 top
C965  2.4 pF  [0402_MURATA]  129.1,128.78 90 top
C966  9.1pF  [0402-TIGHT]  127.19,136.84 90 top
C967  100pF  [0402-TIGHT]  121.98,135.7 270 top
C968  2.2uF  [0402-TIGHT]  120.97,135.7 270 top
C969  10uF  [0402-TIGHT]  119.95,135.7 270 top
C970  100pF  [0402-TIGHT]  127.44,132.27 90 top
C971  2.2uF  [0402-TIGHT]  127.44,134.68 90 top
C972  22pF  [0402-TIGHT]  131.64,121.16 270 top
C973  0.1uF  [0402-TIGHT]  132.59,121.16 270 top
C974  0.1uF  [0402-TIGHT]  132.72,109.86 0 top
C975  10nF  [0402-TIGHT]  121.54,110.36 180 top
C976  1.0uF  [0402-TIGHT]  123.83,111.38 180 top
C977  2.2uF  [0402-TIGHT]  120.9,112.78 270 top
C978  0.1uF  [0402-TIGHT]  120.9,114.81 90 top
C979  1.0uF  [0402-TIGHT]  118.11,137.29 90 top
C980  0.1uF  [0402-TIGHT]  132.33,113.79 270 top
E$1  [FIDUCIAL-1X2]  23.88,142.56 0 top
E$2  [FIDUCIAL-1X2]  23.88,142.56 0 bottom
E$3  [FIDUCIAL-1X2]  139.13,142.56 0 top
E$4  [FIDUCIAL-1X2]  139.13,142.56 0 bottom
E$5  [FIDUCIAL-1.5X3]  23.88,4.76 0 top
E$6  [FIDUCIAL-1.5X3]  23.88,4.76 0 bottom
FD1  FIDUCIAL1X2  [FIDUCIAL-1X2]  30.99,38.93 0 top
FD2  FIDUCIAL1X2  [FIDUCIAL-1X2]  30.99,38.93 0 bottom
FD3  FIDUCIAL1X2  [FIDUCIAL-1X2]  13.21,7.81 0 top